# Altium PCB PCB1.PcbDoc
Units mm, origin at the board's own origin, x right, y up, seen from the top; angles counter-clockwise.
Board outline 80 x 65 mm, 4 copper layers (Top Layer 1, Top Layer, Bottom Layer, Bottom Layer 1), stack 0.534 mm thick; 132 components, 100 nets, 450 pads, 41 vias.
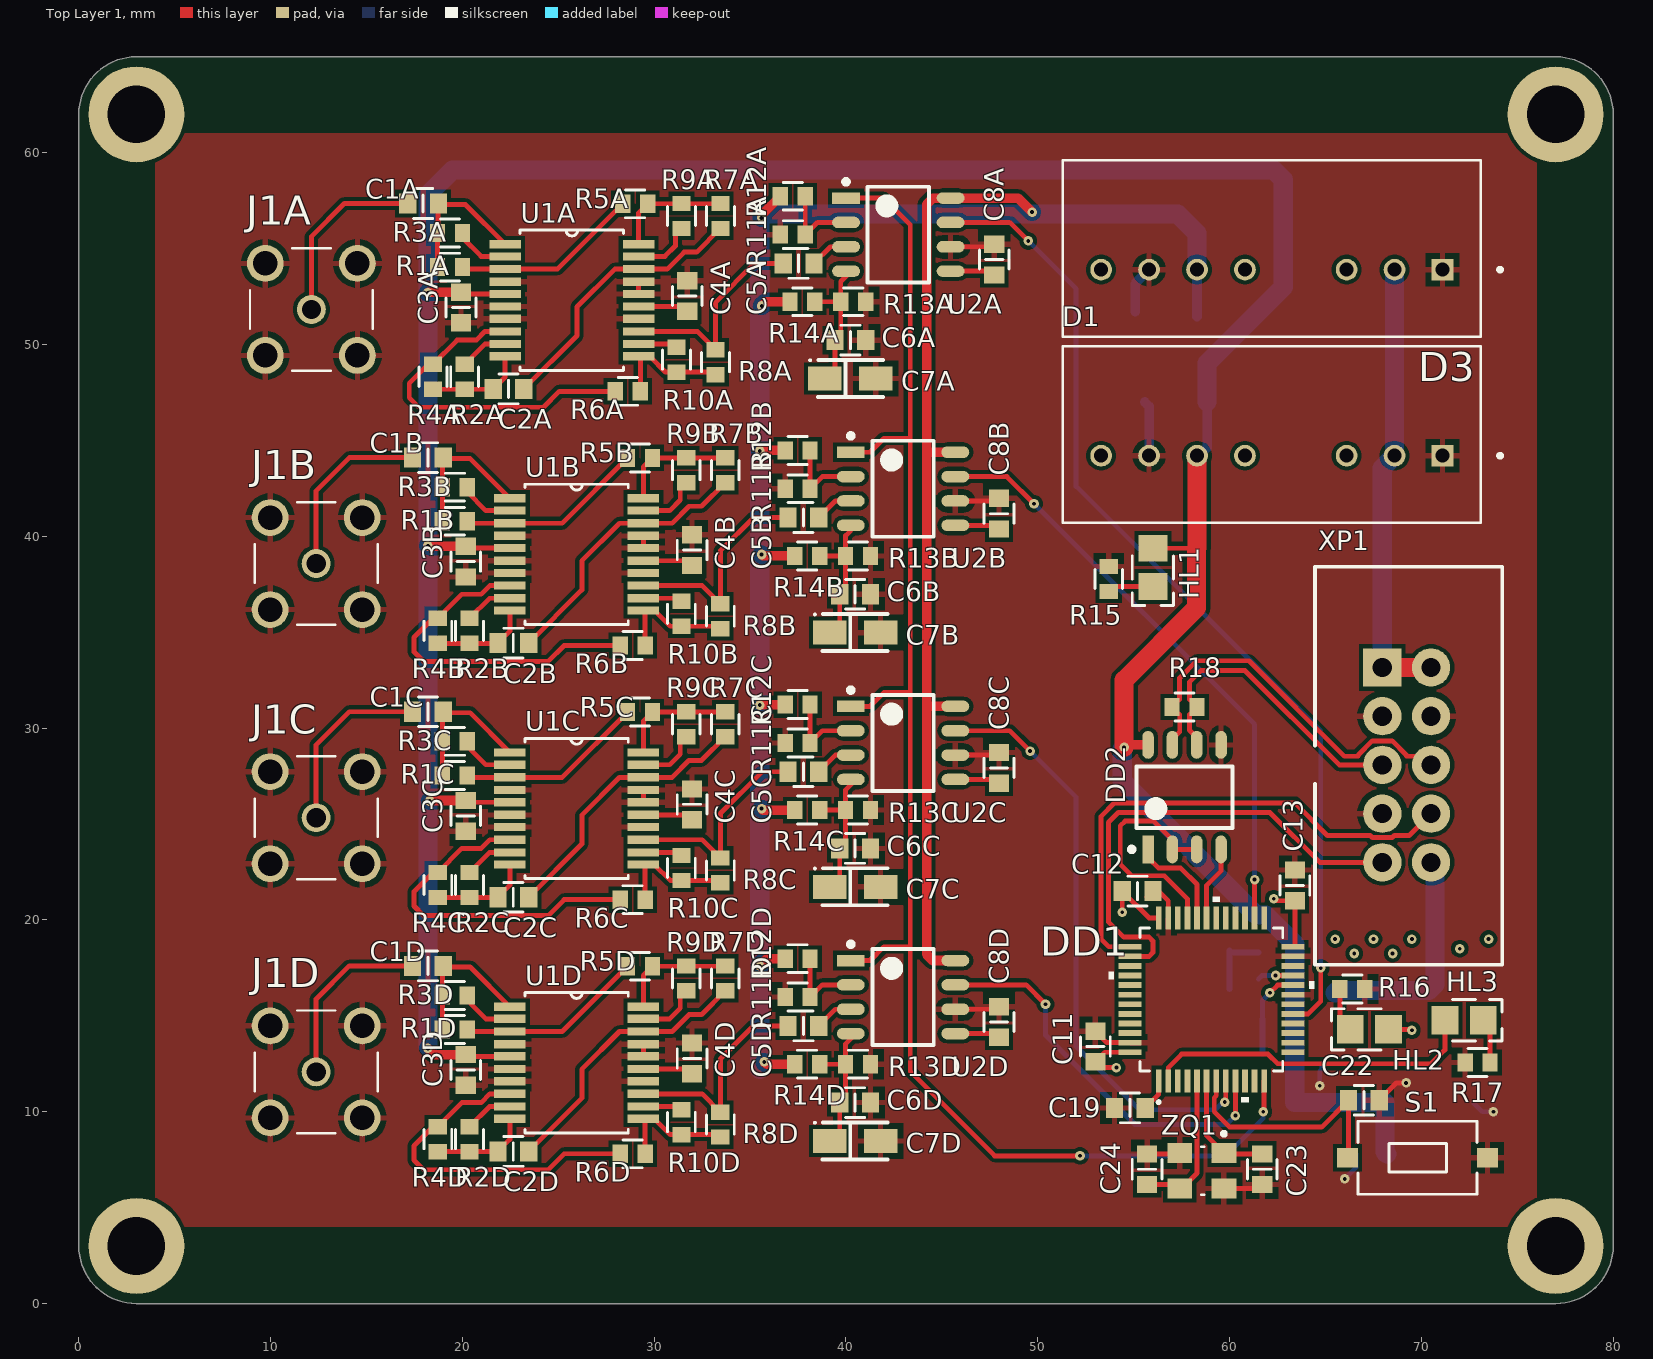
[diagram p0: Top Layer 1 view]
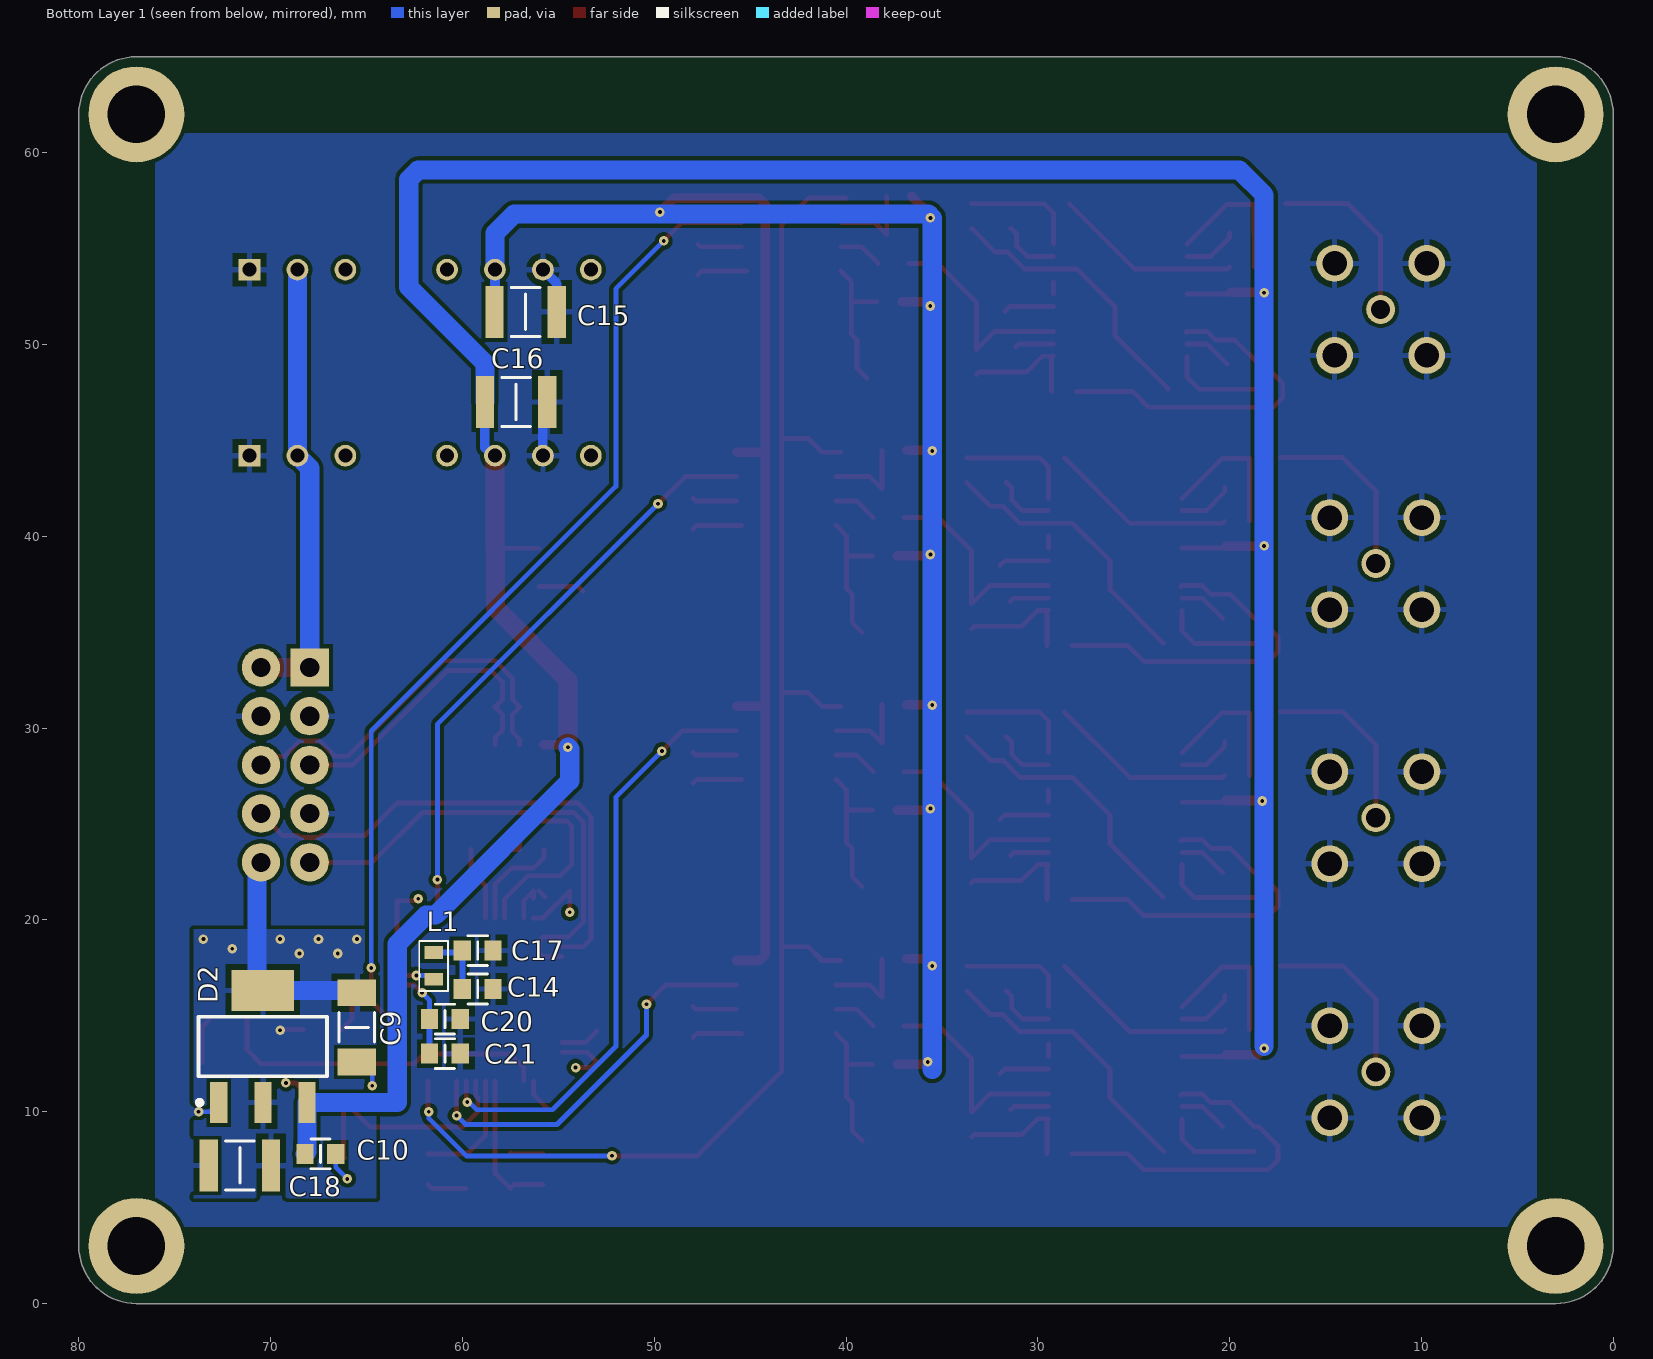
[diagram p1: Bottom Layer 1 view, seen from below]
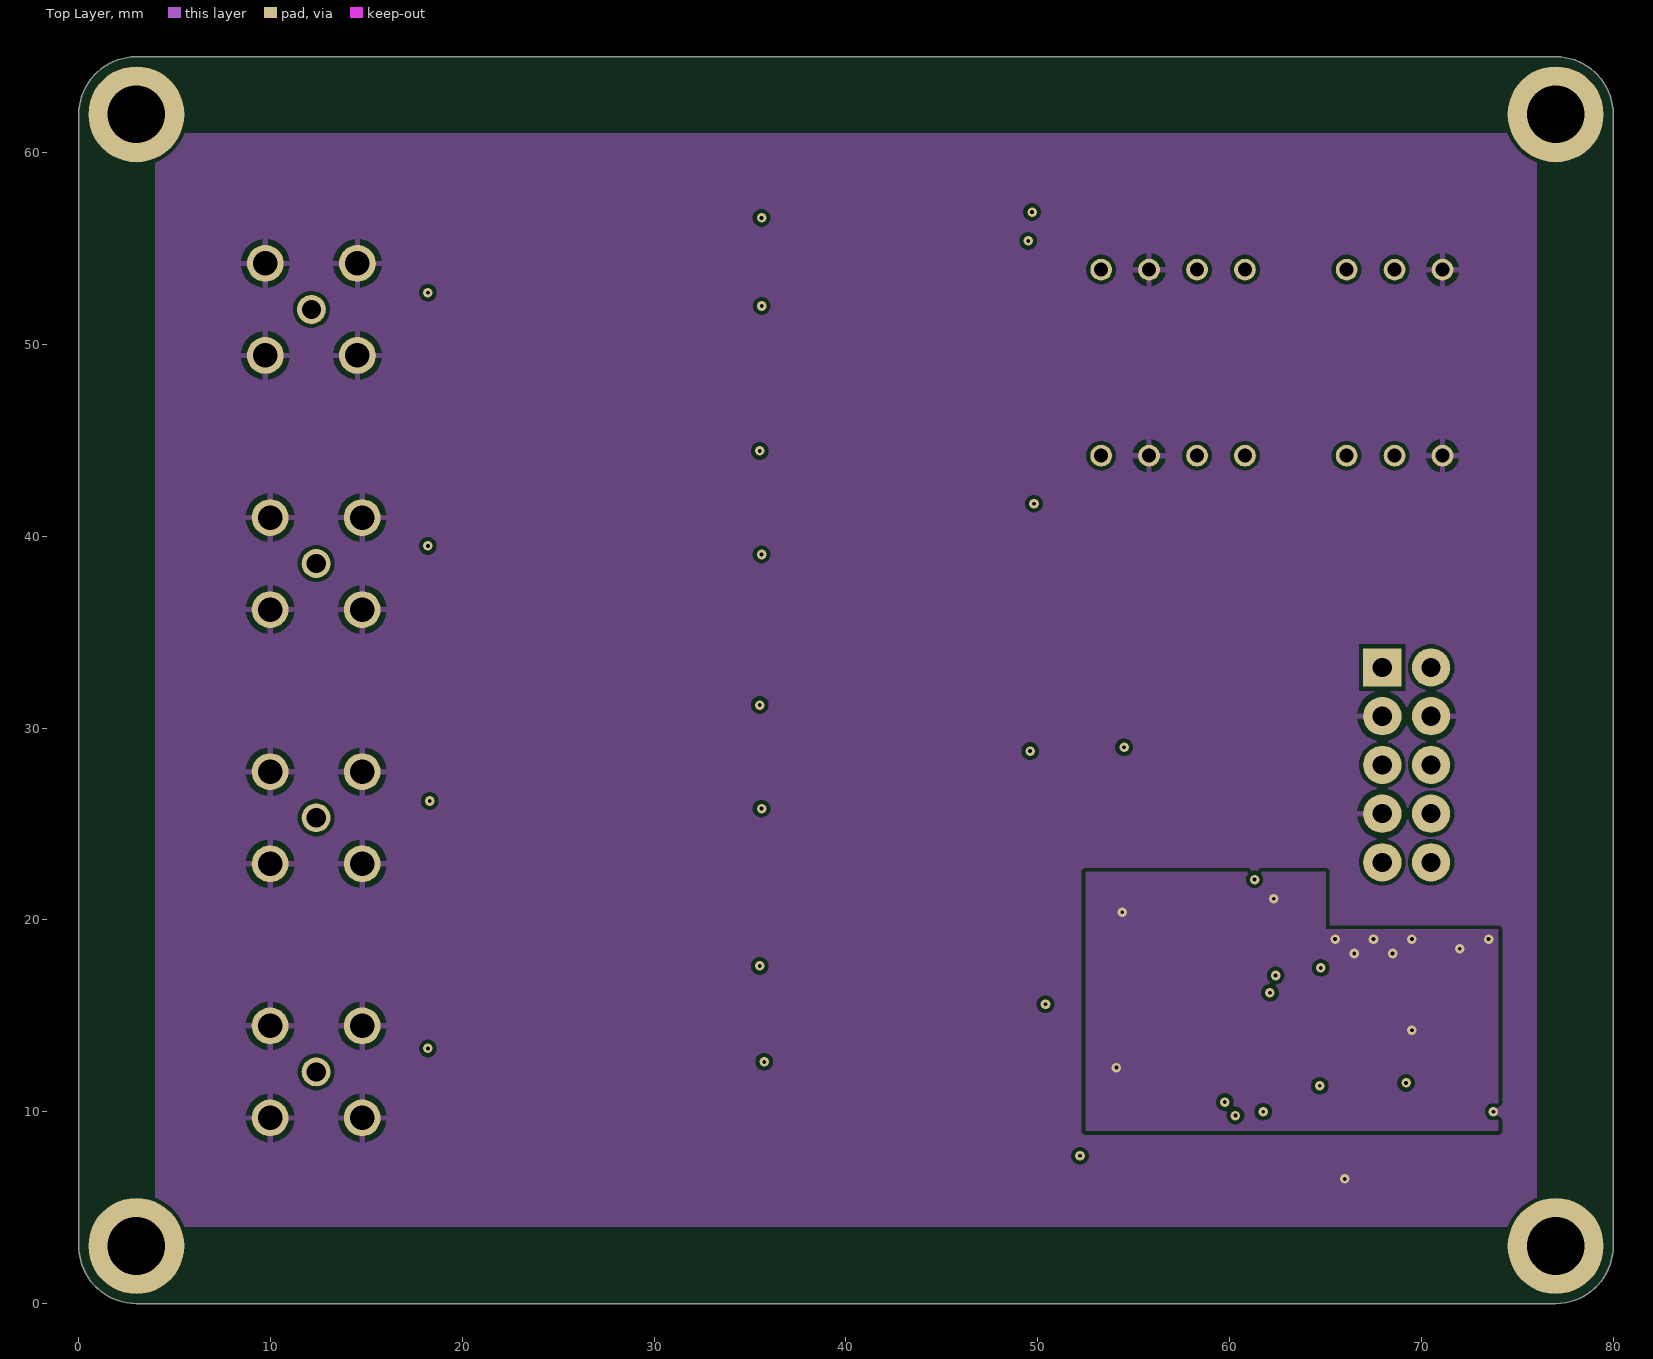
[diagram p2: Top Layer]
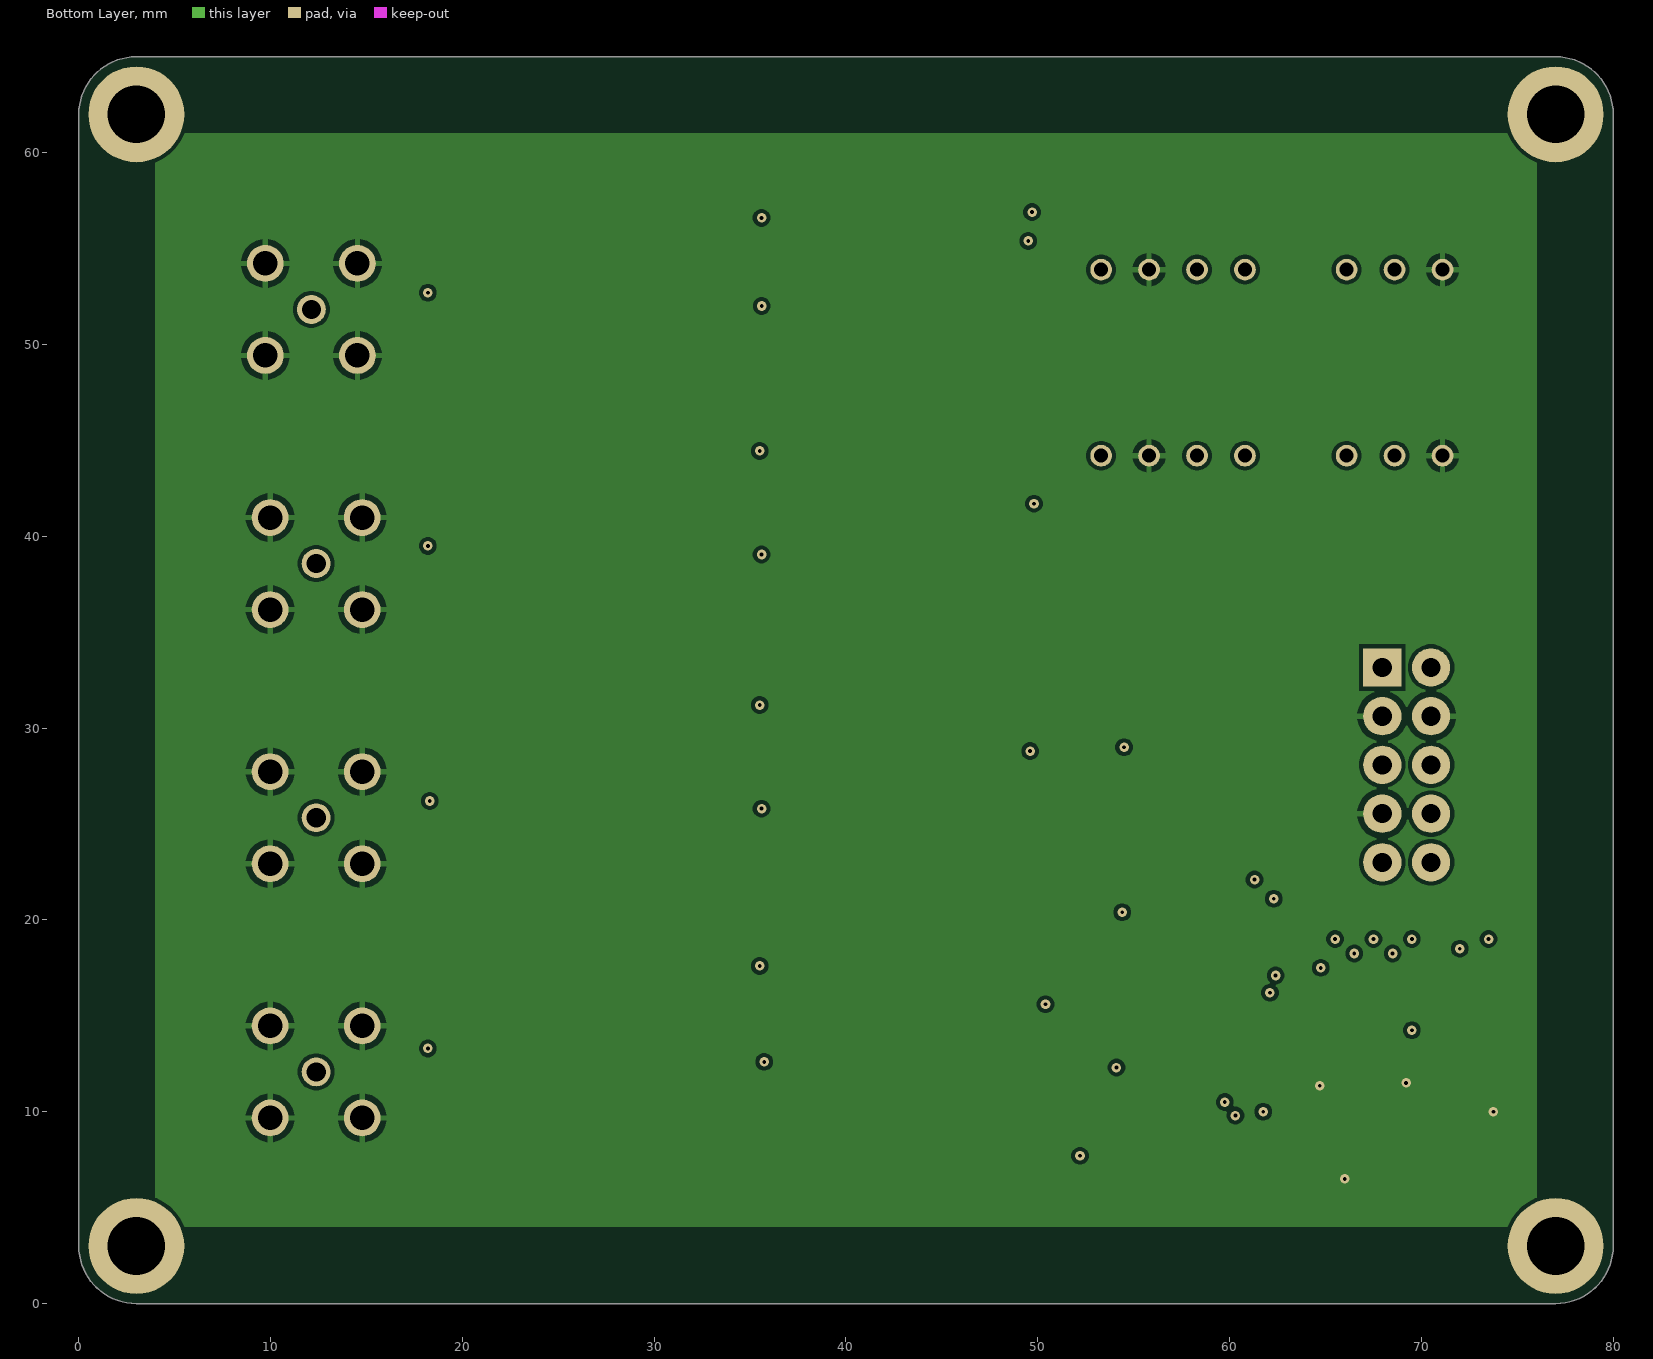
[diagram p3: Bottom Layer]
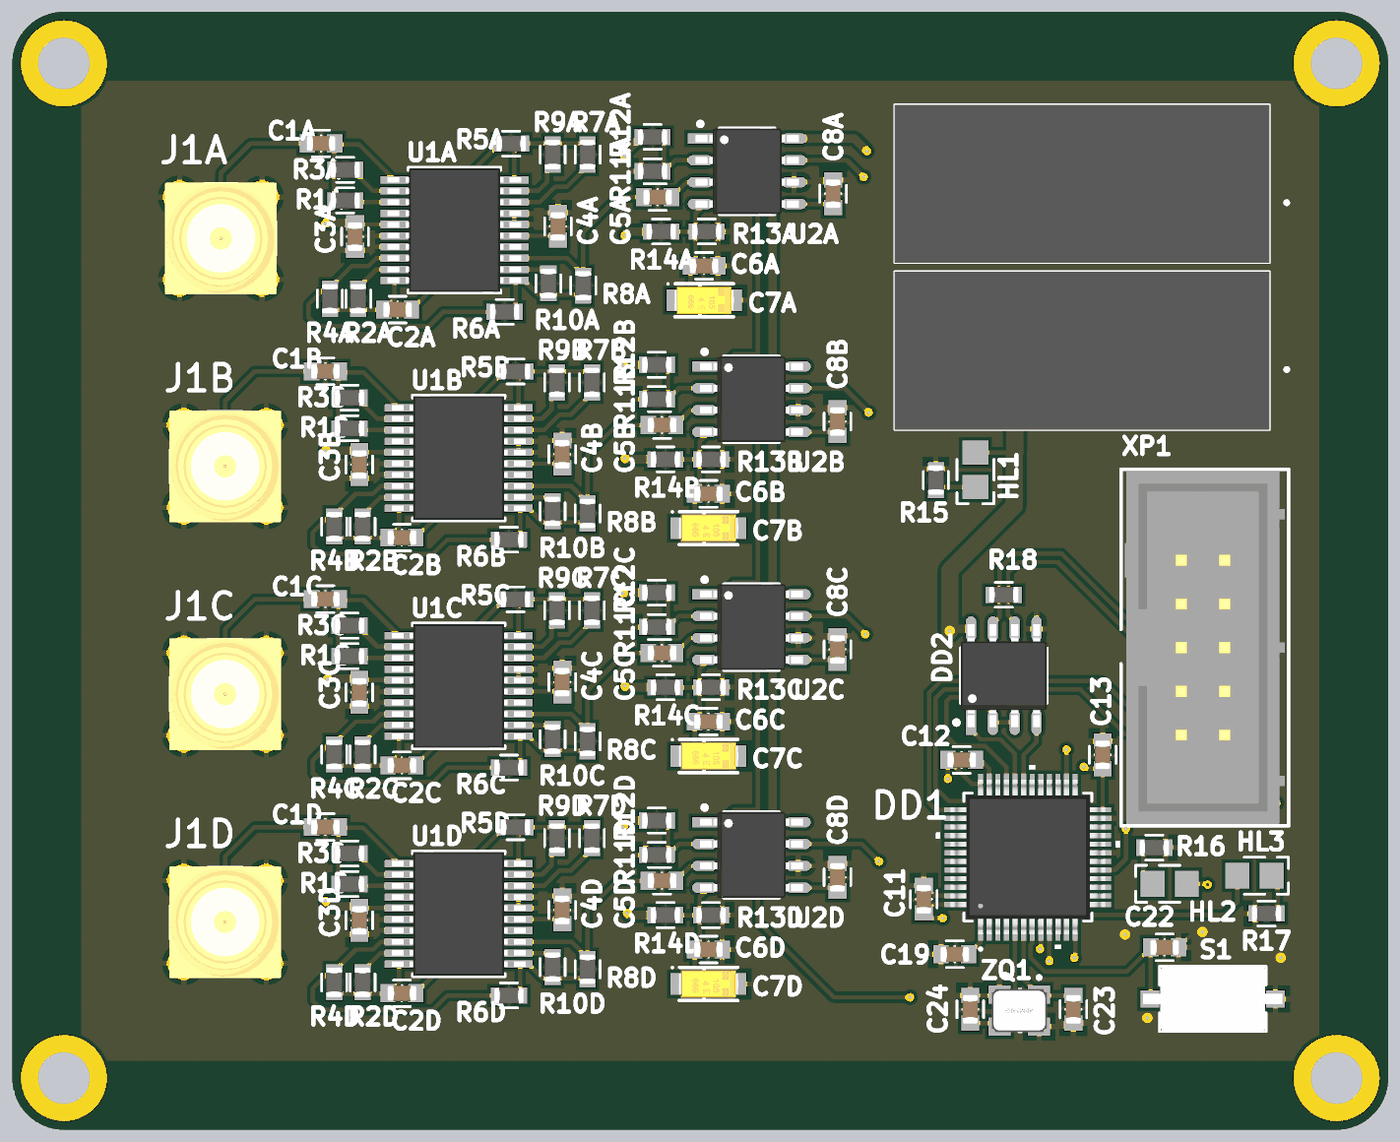
[diagram p4: 3D render of the assembled board from above, using the file's embedded part models]
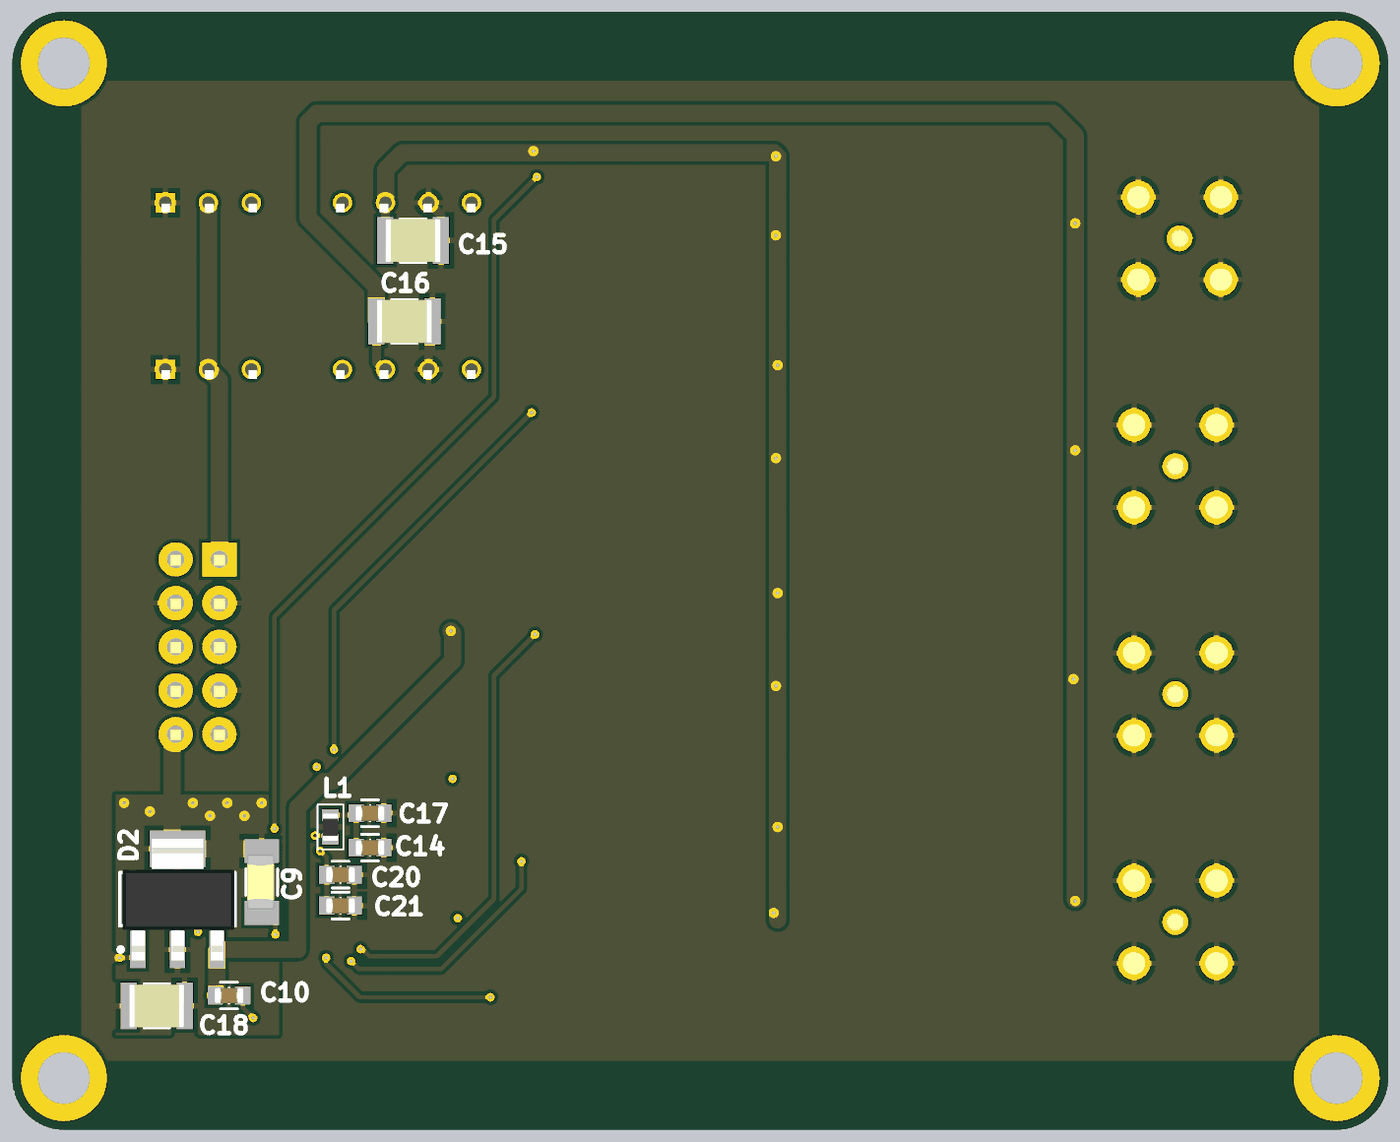
[diagram p5: 3D render of the assembled board from below, using the file's embedded part models]

## Layer stack, top to bottom
Top Solder: solder mask 0.0102, Solder Resist, Dk 3.5
Top Layer 1: signal copper 0.018
Dielectric 2: prepreg 0.0711, PP-006, Dk 4.1
Top Layer: signal copper 0.018
Dielectric 1: dielectric 0.32, FR-4, Dk 4.8
Bottom Layer: signal copper 0.018
Dielectric 3: prepreg 0.0711, PP-006, Dk 4.1
Bottom Layer 1: signal copper 0.018
Bottom Solder: solder mask 0.0102, Solder Resist, Dk 3.5

## Board outline
0,3 0,62 cw(c3,62) 3,65 77,65 cw(c77,62) 80,62 80,3 cw(c77,3) 77,0 3,0 cw(c3,3)

## Design rules (kind name [scope] priority, off if disabled: settings)
AcuteAngle [All] p1: minimum=3.50000000000000E+0001 checktracksonly=FALSE
BoardOutlineClearance "BoardOutlineClearance 1" [All] p1: gap=0.25 ignorepadtopadclearanceinfootprint=FALSE except(0: Arc-SplitContinuation Track-SplitContinuation SMDPad-SplitContinuation THPad-SplitContinuation Via-SplitContinuation Fill-SplitContinuation Poly-SplitContinuation Region-SplitContinuation Text-SplitContinuation) // Milling
BoardOutlineClearance "BoardOutlineClearance 2" [All] p2: gap=0.4 ignorepadtopadclearanceinfootprint=FALSE except(0: Arc-SplitContinuation Track-SplitContinuation SMDPad-SplitContinuation THPad-SplitContinuation Via-SplitContinuation Fill-SplitContinuation Poly-SplitContinuation Region-SplitContinuation Text-SplitContinuation) // V-Cut
Clearance "Clearance-1 1/2 Oz" [All] p1: gap=0.125 ignorepadtopadclearanceinfootprint=FALSE except(0.2: Arc-Fill Arc-Poly Track-Fill Track-Poly SMDPad-SMDPad SMDPad-Fill SMDPad-Poly THPad-Fill THPad-Poly Via-Fill Via-Poly Fill-Fill Fill-Poly Poly-Poly Poly-Region Poly-Text; 0.25: Arc-Hole Track-Hole SMDPad-Hole THPad-Hole Via-Hole Fill-Hole Poly-Hole Region-Hole Text-Hole) // Standart
DiffPairsRouting "DiffPairsRouting 1 Oz" [All] p1: maxlimit=0.254 minlimit=0.2 mostfreqgap=0.254 toplayer_minwidth=0.2 toplayer_maxwidth=0.381 toplayer_prefwidth=0.381 midlayer1_minwidth=0.2 midlayer1_maxwidth=0.381 midlayer1_prefwidth=0.381 midlayer2_minwidth=0.2 midlayer2_maxwidth=0.381 midlayer2_prefwidth=0.381 bottomlayer_minwidth=0.2 bottomlayer_maxwidth=0.381 bottomlayer_prefwidth=0.381 maxuncoupledlength=12.7
DiffPairsRouting "DiffPairsRouting 1/2 Oz" [All] p2: maxlimit=0.254 minlimit=0.1 mostfreqgap=0.254 toplayer_minwidth=0.1 toplayer_maxwidth=0.381 toplayer_prefwidth=0.381 midlayer1_minwidth=0.1 midlayer1_maxwidth=0.381 midlayer1_prefwidth=0.381 midlayer2_minwidth=0.1 midlayer2_maxwidth=0.381 midlayer2_prefwidth=0.381 bottomlayer_minwidth=0.1 bottomlayer_maxwidth=0.381 bottomlayer_prefwidth=0.381 maxuncoupledlength=12.7
HoleSize "Minimum HoleSize VIA 1" [IsVia] p1: absolutevalues=TRUE maxlimit=5.9 minlimit=0.2 maxpercent=80.000 minpercent=20.000 // Standart
HoleToHoleClearance Hole2HoleClearance [All] p1: gap=0.25 allowstackedmicrovias=FALSE
MinimumAnnularRing "Minimum AR VIA Standart" [IsVia] p1: minimumring=0.15
MinimumAnnularRing "Minimum AR PAD Standart" [IsPAD] p2: minimumring=0.2
MinimumAnnularRing "Minimum AR VIA Advance" [IsVia] p3: minimumring=0.1
MinimumAnnularRing "Minimum AR PAD Advance" [IsPAD] p4: minimumring=0.15
MinimumSolderMaskSliver "SolderMask Bridge Standart" [All] p1: minsoldermaskwidth=0.15 // All Masks
MinimumSolderMaskSliver "SolderMask Bridge Advance" [All] p2: minsoldermaskwidth=0.1 // Mask LDI
PlaneClearance "PlaneClearance 3 Oz" [All] p1 off: clearance=0.35
PlaneClearance "PlaneClearance 2 Oz" [All] p2: clearance=0.3
PlaneClearance "PlaneClearance 1 Oz" [All] p3: clearance=0.2
PlaneClearance "PlaneClearance-1 1/2 Oz" [All] p4: clearance=0.2 // Standart
PlaneClearance "PlaneClearance-2 1/2 Oz" [All] p5: clearance=0.15 // Advance
PlaneConnect "TermalConnect 3 Oz" [All] p1 off: planeconnectstyle=Relief reliefexpansion=0.2 reliefentries=4 reliefconductorwidth=0.35 reliefairgap=0.35 // Standart
PlaneConnect "TermalConnect 2 Oz" [All] p2: planeconnectstyle=Relief reliefexpansion=0.2 reliefentries=4 reliefconductorwidth=0.3 reliefairgap=0.3 // Standart
PlaneConnect "TermalConnect-1 1 Oz" [All] p3: planeconnectstyle=Relief reliefexpansion=0.2 reliefentries=4 reliefconductorwidth=0.2 reliefairgap=0.2 // Standart
PlaneConnect "TermalConnect-2 1 Oz" [All] p4: pad.planeconnectstyle=Relief pad.reliefexpansion=0.15 pad.reliefentries=4 pad.reliefconductorwidth=0.2 pad.reliefairgap=0.2 via.planeconnectstyle=Direct via.reliefexpansion=0.15 via.reliefentries=4 via.reliefconductorwidth=0.15 via.reliefairgap=0.15 // Advance
PlaneConnect "TermalConnect-1 1/2 Oz" [All] p5: planeconnectstyle=Relief reliefexpansion=0.2 reliefentries=4 reliefconductorwidth=0.2 reliefairgap=0.2 // Standart
PlaneConnect "TermalConnect-2 1/2 Oz" [All] p6: pad.planeconnectstyle=Relief pad.reliefexpansion=0.15 pad.reliefentries=4 pad.reliefconductorwidth=0.15 pad.reliefairgap=0.15 via.planeconnectstyle=Direct via.reliefexpansion=0.15 via.reliefentries=4 via.reliefconductorwidth=0.15 via.reliefairgap=0.15 // Advance
PolygonConnect "PolygonConnect 3 Oz" [All] p1 off: thpad.connectstyle=Relief thpad.reliefconductorwidth=0.35 thpad.reliefentries=4 thpad.polygonreliefangle="90 Angle" thpad.airgapwidth=0.35 smdpad.connectstyle=Relief smdpad.reliefconductorwidth=0.35 smdpad.reliefentries=4 smdpad.polygonreliefangle="90 Angle" smdpad.airgapwidth=0.35 via.connectstyle=Direct via.reliefconductorwidth=0.254 via.reliefentries=4 via.polygonreliefangle="90 Angle" via.airgapwidth=0.254
PolygonConnect "PolygonConnect 2 Oz" [All] p2: thpad.connectstyle=Relief thpad.reliefconductorwidth=0.3 thpad.reliefentries=4 thpad.polygonreliefangle="90 Angle" thpad.airgapwidth=0.3 smdpad.connectstyle=Relief smdpad.reliefconductorwidth=0.3 smdpad.reliefentries=4 smdpad.polygonreliefangle="90 Angle" smdpad.airgapwidth=0.3 via.connectstyle=Direct via.reliefconductorwidth=0.254 via.reliefentries=4 via.polygonreliefangle="90 Angle" via.airgapwidth=0.254
PolygonConnect "PolygonConnect-1 1 Oz" [All] p3: thpad.connectstyle=Relief thpad.reliefconductorwidth=0.2 thpad.reliefentries=4 thpad.polygonreliefangle="90 Angle" thpad.airgapwidth=0.2 smdpad.connectstyle=Relief smdpad.reliefconductorwidth=0.2 smdpad.reliefentries=4 smdpad.polygonreliefangle="90 Angle" smdpad.airgapwidth=0.2 via.connectstyle=Direct via.reliefconductorwidth=0.254 via.reliefentries=4 via.polygonreliefangle="90 Angle" via.airgapwidth=0.254 // Standart
PolygonConnect "PolygonConnect-2 1 Oz" [All] p4: thpad.connectstyle=Relief thpad.reliefconductorwidth=0.15 thpad.reliefentries=4 thpad.polygonreliefangle="90 Angle" thpad.airgapwidth=0.15 smdpad.connectstyle=Relief smdpad.reliefconductorwidth=0.15 smdpad.reliefentries=4 smdpad.polygonreliefangle="90 Angle" smdpad.airgapwidth=0.15 via.connectstyle=Direct via.reliefconductorwidth=0.254 via.reliefentries=4 via.polygonreliefangle="90 Angle" via.airgapwidth=0.254 // Advance
PolygonConnect "PolygonConnect-1 1/2 Oz" [All] p5: thpad.connectstyle=Relief thpad.reliefconductorwidth=0.15 thpad.reliefentries=4 thpad.polygonreliefangle="90 Angle" thpad.airgapwidth=0.2 smdpad.connectstyle=Relief smdpad.reliefconductorwidth=0.2 smdpad.reliefentries=4 smdpad.polygonreliefangle="90 Angle" smdpad.airgapwidth=0.2 via.connectstyle=Direct via.reliefconductorwidth=0.254 via.reliefentries=4 via.polygonreliefangle="90 Angle" via.airgapwidth=0.254 // Standart
PolygonConnect "PolygonConnect-2 1/2 Oz" [All] p6: thpad.connectstyle=Relief thpad.reliefconductorwidth=0.125 thpad.reliefentries=4 thpad.polygonreliefangle="90 Angle" thpad.airgapwidth=0.15 smdpad.connectstyle=Relief smdpad.reliefconductorwidth=0.125 smdpad.reliefentries=4 smdpad.polygonreliefangle="90 Angle" smdpad.airgapwidth=0.15 via.connectstyle=Direct via.reliefconductorwidth=0.254 via.reliefentries=4 via.polygonreliefangle="90 Angle" via.airgapwidth=0.254 // Advance
RoomDefinition CH4 [InComponentClass('CH4')] p1: confinementstyle=ConfineIn formatcopy=TRUE lockcomponents=FALSE outline 8.454,6.6 49.204,6.6 49.204,19.35 8.454,19.35
RoomDefinition CH1 [InComponentClass('CH1')] p2: confinementstyle=ConfineIn formatcopy=TRUE lockcomponents=FALSE outline 8.204,46.35 48.954,46.35 48.954,59.1 8.204,59.1
RoomDefinition CH3 [InComponentClass('CH3')] p3: confinementstyle=ConfineIn formatcopy=TRUE lockcomponents=FALSE outline 8.454,19.85 49.204,19.85 49.204,32.6 8.454,32.6
RoomDefinition CH2 [InComponentClass('CH2')] p4: confinementstyle=ConfineIn formatcopy=TRUE lockcomponents=FALSE outline 8.454,33.1 49.204,33.1 49.204,45.85 8.454,45.85
RoutingCorners [All] p1 off: cornerstyle=45-Degree minsetback=2.54 maxsetback=2.54
RoutingVias [All] p1: holewidth=0.3 width=0.6 viastyle="Through Hole" minholewidth=0.2 minwidth=0.4 maxholewidth=5.9 maxwidth=6.4
SilkToSilkClearance Silk2SilkClearance [All] p1 off: silktosilkclearance=0.15
SilkToSolderMaskClearance Silk2SolderMaskClearance [IsPad] p1 off: minsilkscreentomaskgap=0.15 clearancetoexposedcopper=TRUE
SolderMaskExpansion SolderMaskExpansion-1 [All] p1: expansion=0.05 istentingtop=FALSE // Standart
SupplyNets "Schematic Supply Nets_6" [InNet('+3,3В')] p1: voltage=0.000
SupplyNets "Schematic Supply Nets_4" [InNet('+16В')] p2: voltage=0.000
SupplyNets "Schematic Supply Nets_3" [InNet('AGND')] p3: voltage=0.000
SupplyNets "Schematic Supply Nets_1" [InNet('+12В')] p4: voltage=0.000
SupplyNets "Schematic Supply Nets" [InNet('+5В')] p5: voltage=0.000
UnRoutedNet [All] p1: checkbadconnections=TRUE
Width "Width 1/2 Oz" [All] p1: maxlimit=10 minlimit=0.1 preferedwidth=0.125 checkconnectedcopper=TRUE
20 further rules are at their usual default settings.

## Classes and differential pairs
component class Main: C9 C10 C11 C12 C13 C14 C15 C16 C17 C18 C19 C20 C21 C22 C23 C24 D1 D2 D3 DD1 DD2 HL1 HL2 HL3 L1 R15 R16 R17 R18 S1 XP1 ZQ1
channel class Chanel: CH1 CH2 CH3 CH4
component class CH4: C1D C2D C3D C4D C5D C6D C7D C8D J1D R1D R2D R3D R4D R5D R6D R7D R8D R9D R10D R11D R12D R13D R14D U1D U2D
component class CH3: C1C C2C C3C C4C C5C C6C C7C C8C J1C R1C R2C R3C R4C R5C R6C R7C R8C R9C R10C R11C R12C R13C R14C U1C U2C
component class CH2: C1B C2B C3B C4B C5B C6B C7B C8B J1B R1B R2B R3B R4B R5B R6B R7B R8B R9B R10B R11B R12B R13B R14B U1B U2B
component class CH1: C1A C2A C3A C4A C5A C6A C7A C8A J1A R1A R2A R3A R4A R5A R6A R7A R8A R9A R10A R11A R12A R13A R14A U1A U2A
differential pair RS485: +RS485_P -RS485_N

## Components (designator, comment, footprint, x,y, rotation, side; value= is the part's Value field where it differs from the comment)
C1A "Capacitor" 0603C 17.954,57.35 r0 top value=15.8п (schematic designator C1)
C1B "Capacitor" 0603C 18.204,44.1 r0 top value=15.8п (schematic designator C1)
C1C "Capacitor" 0603C 18.204,30.85 r0 top value=15.8п (schematic designator C1)
C1D "Capacitor" 0603C 18.204,17.6 r0 top value=15.8п (schematic designator C1)
C2A "Capacitor" 0603C 22.405,47.683 r180 top value=15.8п (schematic designator C2)
C2B "Capacitor" 0603C 22.655,34.433 r180 top value=15.8п (schematic designator C2)
C2C "Capacitor" 0603C 22.655,21.183 r180 top value=15.8п (schematic designator C2)
C2D "Capacitor" 0603C 22.655,7.933 r180 top value=15.8п (schematic designator C2)
C3A "Capacitor" 0603C 19.927,51.927 r90 top value="0,1 мк" (schematic designator C3)
C3B "Capacitor" 0603C 20.177,38.677 r90 top value="0,1 мк" (schematic designator C3)
C3C "Capacitor" 0603C 20.177,25.427 r90 top value="0,1 мк" (schematic designator C3)
C3D "Capacitor" 0603C 20.177,12.177 r90 top value="0,1 мк" (schematic designator C3)
C4A "Capacitor" 0603C 31.727,52.527 r270 top value="1 мк" (schematic designator C4)
C4B "Capacitor" 0603C 31.977,39.277 r270 top value="1 мк" (schematic designator C4)
C4C "Capacitor" 0603C 31.977,26.027 r270 top value="1 мк" (schematic designator C4)
C4D "Capacitor" 0603C 31.977,12.777 r270 top value="1 мк" (schematic designator C4)
C5A "Capacitor" 0603C 37.527,54.227 r0 top value="0,1 мк" (schematic designator C5)
C5B "Capacitor" 0603C 37.777,40.977 r0 top value="0,1 мк" (schematic designator C5)
C5C "Capacitor" 0603C 37.777,27.727 r0 top value="0,1 мк" (schematic designator C5)
C5D "Capacitor" 0603C 37.777,14.477 r0 top value="0,1 мк" (schematic designator C5)
C6A "Capacitor" 0603C 40.227,50.227 r0 top value="0,1 мк" (schematic designator C6)
C6B "Capacitor" 0603C 40.477,36.977 r0 top value="0,1 мк" (schematic designator C6)
C6C "Capacitor" 0603C 40.477,23.727 r0 top value="0,1 мк" (schematic designator C6)
C6D "Capacitor" 0603C 40.477,10.477 r0 top value="0,1 мк" (schematic designator C6)
C7A "Capacitor" TC_A 40.227,48.227 r0 top value="100 мк" (schematic designator C7)
C7B "Capacitor" TC_A 40.477,34.977 r0 top value="100 мк" (schematic designator C7)
C7C "Capacitor" TC_A 40.477,21.727 r0 top value="100 мк" (schematic designator C7)
C7D "Capacitor" TC_A 40.477,8.477 r0 top value="100 мк" (schematic designator C7)
C8A "Capacitor" 0603C 47.727,54.427 r270 top value=15.8п (schematic designator C8)
C8B "Capacitor" 0603C 47.977,41.177 r270 top value=15.8п (schematic designator C8)
C8C "Capacitor" 0603C 47.977,27.927 r270 top value=15.8п (schematic designator C8)
C8D "Capacitor" 0603C 47.977,14.677 r270 top value=15.8п (schematic designator C8)
C9 "Capacitor" 1206C 65.5,14.4 r90 bottom value="4,7 мк"
C10 "Capacitor" 0603C 67.4,7.8 r0 bottom value="0,1 мк"
C11 "Capacitor" 0603C 53,13.4 r270 top value="0,1 мк"
C12 "Capacitor" 0603C 55.2,21.5 r180 top value="0,1 мк"
C13 "Capacitor" 0603C 63.4,21.8 r270 top value="0,1 мк"
C14 "Capacitor" 0603C 59.2,16.4 r0 bottom value="1 мк"
C15 "Capacitor" 1210C 56.7,51.7 r0 bottom value="10 мк"
C16 "Capacitor" 1210C 57.2,47 r0 bottom value="10 мк"
C17 "Capacitor" 0603C 59.2,18.4 r0 bottom value="0,1 мк"
C18 "Capacitor" 1210C 71.6,7.2 r180 bottom value="10 мк"
C19 "Capacitor" 0603C 54.8,10.2 r0 top value="1 мк"
C20 "Capacitor" 0603C 60.914,14.828 r0 bottom value="1 мк"
C21 "Capacitor" 0603C 60.914,13.028 r0 bottom value="0,1 мк"
C22 "Capacitor" 0603C 67,10.6 r180 top value="0,1 мк"
C23 "Capacitor" 0603C 61.7,7 r90 top value="12 п"
C24 "Capacitor" 0603C 55.7,7 r270 top value="12 п"
D1 "SPBW06F-5" CONV_SPBW06F-12 62.2,45.3 r180 top
D2 "LD1117S33CTR" SOT223 70.4,13.4 r90 bottom
D3 "SPBW06F-12" CONV_SPBW06F-12 62.2,55 r180 top
DD1 "STM32G473CBTx" LQFP48-7x7mm 59.05,15.85 r90 top locked value=Value
DD2 "MAX485CSA" SOIC-8 57.65,26.4 r90 top
HL1 "LED" 0805D 56,38.373 r270 top
HL2 "LED" 0805D 67.292,14.295 r180 top
HL3 "LED" 0805D 72.226,14.768 r0 top
J1A "SMA_CONNECTOR" SMA_CONNECTOR 12.127,51.827 r90 top (schematic designator J1)
J1B "SMA_CONNECTOR" SMA_CONNECTOR 12.377,38.577 r90 top (schematic designator J1)
J1C "SMA_CONNECTOR" SMA_CONNECTOR 12.377,25.327 r90 top (schematic designator J1)
J1D "SMA_CONNECTOR" SMA_CONNECTOR 12.377,12.077 r90 top (schematic designator J1)
L1 "FCM1608KF-601T05" 0603L 61.5,17.6 r270 bottom
R1A "Resistor" 0603R 19.357,54.033 r0 top value="100 к" (schematic designator R1)
R1B "Resistor" 0603R 19.607,40.783 r0 top value="100 к" (schematic designator R1)
R1C "Resistor" 0603R 19.607,27.533 r0 top value="100 к" (schematic designator R1)
R1D "Resistor" 0603R 19.607,14.283 r0 top value="100 к" (schematic designator R1)
R2A "Resistor" 0603R 20.119,48.318 r90 top value="100 к" (schematic designator R2)
R2B "Resistor" 0603R 20.369,35.068 r90 top value="100 к" (schematic designator R2)
R2C "Resistor" 0603R 20.369,21.818 r90 top value="100 к" (schematic designator R2)
R2D "Resistor" 0603R 20.369,8.568 r90 top value="100 к" (schematic designator R2)
R3A "Resistor" 0603R 19.357,55.811 r0 top value="52.3 к" (schematic designator R3)
R3B "Resistor" 0603R 19.607,42.561 r0 top value="52.3 к" (schematic designator R3)
R3C "Resistor" 0603R 19.607,29.311 r0 top value="52.3 к" (schematic designator R3)
R3D "Resistor" 0603R 19.607,16.061 r0 top value="52.3 к" (schematic designator R3)
R4A "Resistor" 0603R 18.468,48.318 r90 top value="52.3 к" (schematic designator R4)
R4B "Resistor" 0603R 18.718,35.068 r90 top value="52.3 к" (schematic designator R4)
R4C "Resistor" 0603R 18.718,21.818 r90 top value="52.3 к" (schematic designator R4)
R4D "Resistor" 0603R 18.718,8.568 r90 top value="52.3 к" (schematic designator R4)
R5A "Resistor" 0603R 29.009,57.335 r0 top value="270 к" (schematic designator R5)
R5B "Resistor" 0603R 29.259,44.085 r0 top value="270 к" (schematic designator R5)
R5C "Resistor" 0603R 29.259,30.835 r0 top value="270 к" (schematic designator R5)
R5D "Resistor" 0603R 29.259,17.585 r0 top value="270 к" (schematic designator R5)
R6A "Resistor" 0603R 28.628,47.556 r0 top value="270 к" (schematic designator R6)
R6B "Resistor" 0603R 28.878,34.306 r0 top value="270 к" (schematic designator R6)
R6C "Resistor" 0603R 28.878,21.056 r0 top value="270 к" (schematic designator R6)
R6D "Resistor" 0603R 28.878,7.806 r0 top value="270 к" (schematic designator R6)
R7A "Resistor" 0603R 33.454,56.7 r90 top value="47.5 к" (schematic designator R7)
R7B "Resistor" 0603R 33.704,43.45 r90 top value="47.5 к" (schematic designator R7)
R7C "Resistor" 0603R 33.704,30.2 r90 top value="47.5 к" (schematic designator R7)
R7D "Resistor" 0603R 33.704,16.95 r90 top value="47.5 к" (schematic designator R7)
R8A "Resistor" 0603R 33.2,49.08 r270 top value="47.5 к" (schematic designator R8)
R8B "Resistor" 0603R 33.45,35.83 r270 top value="47.5 к" (schematic designator R8)
R8C "Resistor" 0603R 33.45,22.58 r270 top value="47.5 к" (schematic designator R8)
R8D "Resistor" 0603R 33.45,9.33 r270 top value="47.5 к" (schematic designator R8)
R9A "Resistor" 0603R 31.422,56.7 r90 top value="93.1 к" (schematic designator R9)
R9B "Resistor" 0603R 31.672,43.45 r90 top value="93.1 к" (schematic designator R9)
R9C "Resistor" 0603R 31.672,30.2 r90 top value="93.1 к" (schematic designator R9)
R9D "Resistor" 0603R 31.672,16.95 r90 top value="93.1 к" (schematic designator R9)
R10A "Resistor" 0603R 31.168,49.207 r270 top value="93.1 к" (schematic designator R10)
R10B "Resistor" 0603R 31.418,35.957 r270 top value="93.1 к" (schematic designator R10)
R10C "Resistor" 0603R 31.418,22.707 r270 top value="93.1 к" (schematic designator R10)
R10D "Resistor" 0603R 31.418,9.457 r270 top value="93.1 к" (schematic designator R10)
R11A "Resistor" 0603R 37.227,55.727 r0 top value="1,1 к" (schematic designator R11)
R11B "Resistor" 0603R 37.477,42.477 r0 top value="1,1 к" (schematic designator R11)
R11C "Resistor" 0603R 37.477,29.227 r0 top value="1,1 к" (schematic designator R11)
R11D "Resistor" 0603R 37.477,15.977 r0 top value="1,1 к" (schematic designator R11)
R12A "Resistor" 0603R 37.227,57.727 r180 top value="12 к" (schematic designator R12)
R12B "Resistor" 0603R 37.477,44.477 r180 top value="12 к" (schematic designator R12)
R12C "Resistor" 0603R 37.477,31.227 r180 top value="12 к" (schematic designator R12)
R12D "Resistor" 0603R 37.477,17.977 r180 top value="12 к" (schematic designator R12)
R13A "Resistor" 0603R 40.377,52.227 r180 top value="3,0 к" (schematic designator R13)
R13B "Resistor" 0603R 40.627,38.977 r180 top value="3,0 к" (schematic designator R13)
R13C "Resistor" 0603R 40.627,25.727 r180 top value="3,0 к" (schematic designator R13)
R13D "Resistor" 0603R 40.627,12.477 r180 top value="3,0 к" (schematic designator R13)
R14A "Resistor" 0603R 37.727,52.227 r180 top value="3,0 к" (schematic designator R14)
R14B "Resistor" 0603R 37.977,38.977 r180 top value="3,0 к" (schematic designator R14)
R14C "Resistor" 0603R 37.977,25.727 r180 top value="3,0 к" (schematic designator R14)
R14D "Resistor" 0603R 37.977,12.477 r180 top value="3,0 к" (schematic designator R14)
R15 "Resistor" 0603R 53.7,37.773 r270 top value="2,0 к"
R16 "Resistor" 0603R 66.4,16.4 r180 top value="1,0 к"
R17 "Resistor" 0603R 72.926,12.568 r0 top value="1,0 к"
R18 "Resistor" 0603R 57.65,31.1 r180 top value=120
S1 "TSS-TD-19XA-XTR" TSS-TD-19XA-XTR 69.8,7.6 r180 top
U1A "LTC1562CG" 20-SSOP 25.707,52.306 r0 top (schematic designator U1)
U1B "LTC1562CG" 20-SSOP 25.957,39.056 r0 top (schematic designator U1)
U1C "LTC1562CG" 20-SSOP 25.957,25.806 r0 top (schematic designator U1)
U1D "LTC1562CG" 20-SSOP 25.957,12.556 r0 top (schematic designator U1)
U2A "AD603ARZ-REEL-REEL7" SOIC-8 42.727,55.727 r0 top (schematic designator U2)
U2B "AD603ARZ-REEL-REEL7" SOIC-8 42.977,42.477 r0 top (schematic designator U2)
U2C "AD603ARZ-REEL-REEL7" SOIC-8 42.977,29.227 r0 top (schematic designator U2)
U2D "AD603ARZ-REEL-REEL7" SOIC-8 42.977,15.977 r0 top (schematic designator U2)
XP1 "IDC-10" IDC-10 69.21,28.085 r0 top
ZQ1 "XTAL_GND" QSMD3.2x2.5 59.7,7.85 r270 top value="8 МГц"

## Footprints (in the part's own frame and the unit in brackets; to place one, negate y for a bottom-side part, rotate by r counter-clockwise, add the part's x,y. Pads: shape width x height; smd on the part's side, far side on the other; paste and mask are expansions set on the pad)
20-SSOP [mil]
  rect 65x17 smd: 1(-137,115) 2(-137,90) 3(-137,64) 4(-137,38) 5(-137,13) 6(-137,-13) 7(-137,-38) 8(-137,-64) 9(-137,-90) 10(-137,-115) 11(137,-115) 12(137,-90) 13(137,-64) 14(137,-38) 15(137,-13) 16(137,13) 17(137,38) 18(137,64) 19(137,90) 20(137,115)
  silkscreen extent -106,-144 106,144, body extent -153,-142 153,142, height 78
0603C [mm] "Chip Resistor, 2-Leads, Body 1,40x0,80mm, IPC Medium Density"
  rect 0.9x1.05 smd: 1(-0.8,0) 2(0.8,0)
  silkscreen extent -0.5,-0.78 0.5,0.77, body extent -0.85,-0.45 0.85,0.45, height 0.9
0603L [mm] "Chip Inductor, 2-Leads, Body 1,55x0,85mm, IPC Medium Density"
  rect 0.67x0.97 smd: 1(-0.695,0) 2(0.695,0)
  silkscreen extent -1.3,-0.75 1.3,0.75, body extent -0.8,-0.45 0.8,0.45, height 0.45
0603R [mm] "Chip Resistor, 2-Leads, Body 1.60x0.85mm, IPC Medium Density"
  rect 0.8x0.95 smd: 1(-0.65,0) 2(0.65,0)
  silkscreen extent -0.5,-0.72 0.5,0.72, body extent -0.87,-0.47 0.88,0.48, height 0.9
0805D [mm]
  rect 1.4x1.5 smd: 1(-1,0) 2(1,0)
  silkscreen extent -0.6,-1.07 1.97,1.07, body extent -1.07,-0.7 1.07,0.7, height 0.7
1206C [mm]
  rect 1.4x2 smd paste+0 mask+0.03: 1(-1.8,0)
  rect 1.4x2 smd paste+0: 2(1.8,0)
  silkscreen extent -0.77,-0.92 0.77,0.92, body extent -1.6,-0.74 1.6,0.86, height 1.59
1210C [mm]
  rect 0.954x2.706 smd paste+0: 1(-1.625,0) 2(1.625,0)
  silkscreen extent -0.75,-1.28 0.75,1.28, body extent -1.6,-1.25 1.6,1.25, height 2.7
CONV_SPBW06F-12 [mm]
  rect 1.13x1.13 / inner round 1.13 / far side rect 1.13x1.13 hole 0.73: 1(-8.9,1.1)
  round 1.13 hole 0.73: 2(-6.4,1.1) 3(-3.9,1.1) 5(1.4,1.1) 6(3.9,1.1) 7(6.4,1.1) 8(8.9,1.1)
  silkscreen extent -12,-4.6 10.9,4.6, body extent -10.9,-4.6 10.9,4.6, height 11.1
IDC-10 [mm] "IDC-10 Male Connector"
  rect 2x2 hole 1: 1(-1.25,5.075)
  round 2 hole 1: 2(1.29,5.075) 3(-1.25,2.535) 4(1.29,2.535) 5(-1.25,-0.005) 6(1.29,-0.005) 7(-1.25,-2.545) 8(1.29,-2.545) 9(-1.25,-5.085) 10(1.29,-5.085)
  silkscreen extent -4.75,-10.42 5,10.32, body extent -4.53,-10.31 4.77,10.19, height 9.1
LQFP48-7x7mm [mm]
  rect 1.194x0.3 smd paste+0 mask+0.025: 1(-4.25,2.75) 2(-4.25,2.25) 3(-4.25,1.75) 4(-4.25,1.25) 5(-4.25,0.75) 6(-4.25,0.25) 7(-4.25,-0.25) 8(-4.25,-0.75) 9(-4.25,-1.25) 10(-4.25,-1.75) 11(-4.25,-2.25) 12(-4.25,-2.75) 25(4.25,-2.75) 26(4.25,-2.25) 27(4.25,-1.75) 28(4.25,-1.25) 29(4.25,-0.75) 30(4.25,-0.25) 31(4.25,0.25) 32(4.25,0.75) 33(4.25,1.25) 34(4.25,1.75) 35(4.25,2.25) 36(4.25,2.75)
  rect 0.3x1.194 smd paste+0 mask+0.025: 13(-2.75,-4.25) 14(-2.25,-4.25) 15(-1.75,-4.25) 16(-1.25,-4.25) 17(-0.75,-4.25) 18(-0.25,-4.25) 19(0.25,-4.25) 20(0.75,-4.25) 21(1.25,-4.25) 22(1.75,-4.25) 23(2.25,-4.25) 24(2.75,-4.25) 37(2.75,4.25) 38(2.25,4.25) 39(1.75,4.25) 40(1.25,4.25) 41(0.75,4.25) 42(0.25,4.25) 43(-0.25,4.25) 44(-0.75,4.25) 45(-1.25,4.25) 46(-1.75,4.25) 47(-2.25,4.25) 48(-2.75,4.25)
  silkscreen extent -5.43,-5.35 5.35,5.35, body extent -4.5,-4.5 4.5,4.5, height 1.6
QSMD3.2x2.5 [mm] "Кварцевый резонатор"
  rect 1.05x1.3 smd: 1(0,0) 2(1.85,-2.3) 3(0,-2.3) 3(1.85,0)
  silkscreen extent -1.1,-1.18 2.18,0.1, body extent -0.32,-2.75 2.18,0.45, height 0.8
SMA_CONNECTOR [mm]
  round 1.508 hole 1: 1(0,0)
  round 1.92 hole 1.28: G1(-2.4,2.4) G2(-2.4,-2.4) G3(2.4,-2.4) G4(2.4,2.4)
  silkscreen extent -3.2,-3.2 3.2,3.2, body extent -3.25,-3.25 3.25,3.25, height 13.6
SOIC-8 [mm] "for operational amplifier"
  rect 1.45x0.6 smd: 1(-2.725,1.905)
  oval 1.45x0.6 smd: 2(-2.725,0.635) 3(-2.725,-0.635) 4(-2.725,-1.905) 5(2.725,-1.905) 6(2.725,-0.635) 7(2.725,0.635) 8(2.725,1.905)
  silkscreen extent -2.85,-2.5 1.6,2.88, body extent -3,-2.5 3,2.5, height 1.75
SOT223 [mm] "SOT223, ld1117"
  rect 2.15x0.9 smd: 1(-2.925,2.3) 2(-2.925,0) 3(-2.925,-2.3)
  rect 2.15x3.25 smd: 2(2.925,0)
  silkscreen extent -3.05,-3.35 1.55,3.43, body extent -3.56,-3.3 3.51,3.2, height 1.6
TC_A [mm] "Tantalum capacitor, type A,  1 pin - plus"
  rect 1.75x1.25 smd: 1(-1.325,0) 2(1.325,0)
  silkscreen extent -2.15,-0.97 1.7,1, body extent -1.73,-0.8 1.73,0.8, height 1.64
TSS-TD-19XA-XTR [mm]
  rect 1.1x1 smd: 1(-3.65,0) 2(3.65,0)
  silkscreen extent -3.1,-1.9 3.1,1.9, body extent -4.05,-1.85 4.05,1.85, height 2.55

## Part data
C1A C1B C1C C1D C2A C2B C2C C2D C8A C8B C8C C8D: library part Capacitor_1n_10_50V_X7R_0603C, "Конденсатор 0603C ёмкостью 1 н 10%, 50 В, X7R", Capacity (nF)=1, Dielectric=X7R, Tolerance=10%, Voltage (V)=50, Part Number=Capacitor_1n_10_50V_X7R_0603C
C3A C3B C3C C3D C5A C5B C5C C5D C6A C6B C6C C6D C22: library part Capacitor_0,1u_10_50V_X7R_0603C, "Конденсатор 0603C ёмкостью 0,1 мк 10%, 50 В, X7R", Capacity (nF)=100, Dielectric=X7R, Tolerance=10%, Voltage (V)=50, Part Number=Capacitor_0,1u_10_50V_X7R_0603C
C4A C4B C4C C4D C14 C19 C20: library part Capacitor_1u_10_50V_X7R_0603C, "Конденсатор 0603C ёмкостью 1 мк 10%, 50 В, X7R", Capacity (nF)=1000, Dielectric=X7R, Tolerance=10%, Voltage (V)=50, Part Number=Capacitor_1u_10_50V_X7R_0603C
C7A C7B C7C C7D: library part Capacitor_100u_10_50V_TC_A, "Танталовый конденсатор", Capacity (uF)=100, Tolerance=0,1, Voltage (V)=50, Part Number=Capacitor_100u_10_50V_TC_A, Type=Tantalum
C9: library part Capacitor_4,7u_10_50V_X7R_1206C, "Конденсатор", Capacity (nF)=4700, Dielectric=X7R, Tolerance=0,1, Voltage (V)=50, Library Path2=Schematic\Capacitor.SchLib, Part Number=Capacitor_4,7u_10_50V_X7R_1206C
C10 C11 C12 C13 C17 C21: library part Capacitor_0,1u_10_50V_X7R_0603C, "Конденсатор", Capacity (nF)=100, Dielectric=X7R, Tolerance=0,1, Voltage (V)=50, Library Path2=Schematic\Capacitor.SchLib, Part Number=Capacitor_0,1u_10_50V_X7R_0603C
C15 C16 C18: library part Capacitor_10u_10_35V_X7R_1210C, "Конденсатор", Capacity (nF)=10000, Dielectric=X7R, Tolerance=0,1, Voltage (V)=35, Library Path2=Schematic\Capacitor.SchLib, Part Number=Capacitor_10u_10_35V_X7R_1210C
C23 C24: library part "0,1 мк", "Конденсатор 12п", Part Number=Capacitor
D1: library part SPBW06F-12, "Isolated Module DC DC Converter 1 Output 12V - - - 500mA 9V - 36V Input", Package="SIP-8 Mean Well", Check_prices=https://www.snapeda.com/parts/SPBW06F-12/Mean+Well/view-part/?ref=eda, MF="MEAN WELL", MP=SPBW06F-12, SnapEDA_Link=https://www.snapeda.com/parts/SPBW06F-12/Mean+Well/view-part/?ref=snap
D2: "Линейный стабилизатор напряжения", Part Number=LD1117S33CTR
D3: "Isolated Module DC DC Converter 1 Output 12V - - - 500mA 9V - 36V Input", Package="SIP-8 Mean Well", Check_prices=https://www.snapeda.com/parts/SPBW06F-12/Mean+Well/view-part/?ref=eda, MF="MEAN WELL", MP=SPBW06F-12, SnapEDA_Link=https://www.snapeda.com/parts/SPBW06F-12/Mean+Well/view-part/?ref=snap
DD1: "Mainstream Arm Cortex-M4 core with DSP and FPU, 170MHz with 128Kbytes of Flash memory, Math Accelerator, High Analog level integration", Manufacturer_Part_Number=stm32g4_lqfp48_t1, Built_By=EMA_Jessica, Copyright="Copyright (C) 2016 Accelerated Designs. All rights reserved", RefDes=RefDes, Type=DEV, Vendor=STMicroelectronics
DD2: "RS-485 приёмопередатчик", Part Number=MAX485CSA
HL1 HL2 HL3: "Светодиод", Color=Красный, Part Number=LED
J1A J1B J1C J1D: "Straight SMA Connector", Package=None, Availability=Unavailable, MP=altium_native_batch, Price=None
L1: library part Inductance, "Катушка индуктивности", Part Number=Inductance
R1A R1B R1C R1D R2A R2B R2C R2D R3A R3B R3C R3D R4A R4B R4C R4D R5A R5B R5C R5D R6A R6B R6C R6D: library part Resistor_51k_1_0603, "Резистор номиналом 51 кОм 1%", Tolerance=1%, Part Number=Resistor_51k_1_0603
R7A R7B R7C R7D R8A R8B R8C R8D: library part Resistor_47k_1_0603, "Резистор номиналом 47 кОм 1%", Tolerance=1%, Part Number=Resistor_47k_1_0603
R9A R9B R9C R9D R10A R10B R10C R10D: library part Resistor_91k_1_0603, "Резистор номиналом 91 кОм 1%", Tolerance=1%, Part Number=Resistor_91k_1_0603
R11A R11B R11C R11D: library part Resistor_1.1k_1_0603, "Резистор номиналом 1,1 кОм 1%", Tolerance=1%, Part Number=Resistor_1.1k_1_0603
R12A R12B R12C R12D: library part Resistor_12k_1_0603, "Резистор номиналом 12 кОм 1%", Tolerance=1%, Part Number=Resistor_12k_1_0603
R13A R13B R13C R13D R14A R14B R14C R14D: library part Resistor_3.0k_1_0603, "Резистор номиналом 3,0 кОм 1%", Tolerance=1%, Part Number=Resistor_3.0k_1_0603
R15: library part Resistor_2.0k_1_0603, "Резистор номиналом 2,0 кОм 1%", Tolerance=1%, Part Number=Resistor_2.0k_1_0603
R16 R17: library part Resistor_1.0k_1_0603, "Резистор номиналом 1,0 кОм и точностью 1%", Tolerance=1%, Part Number=Resistor_1.0k_1_0603
R18: library part Resistor_120_1_0603, "Резистор номиналом 120 Ом 1%", Tolerance=1%, Part Number=Resistor_120_1_0603
S1: "Тактовая кнопка", Datasheet=https://cdn.promelec.ru/upload/items/2023/04/17/TSS-TD-19XA.pdf, Part Number=TSS-TD-19XA-XTR, Автор=glebmih
U1A U1B U1C U1D: "Микросхема счетверённый активный полосовый фильтр", Package="SSOP-20 Linear Technology", Check_prices=https://www.snapeda.com/parts/LTC1562CG%23TR/Analog+Devices/view-part/?ref=eda, MF="Analog Devices", MP=LTC1562CG#TR, Part Number=LTC1562CG, SnapEDA_Link=https://www.snapeda.com/parts/LTC1562CG%23TR/Analog+Devices/view-part/?ref=snap
U2A U2B U2C U2D: "Усилитель с регулируемым усилением", Package="SOIC-8 Analog Devices", Check_prices=https://www.snapeda.com/parts/AD603ARZ-REEL7/Analog+Devices/view-part/?ref=eda, MF="Analog Devices", MP=AD603ARZ-REEL7, Part Number=AD603ARZ-REEL-REEL7, SnapEDA_Link=https://www.snapeda.com/parts/AD603ARZ-REEL7/Analog+Devices/view-part/?ref=snap
XP1: "10-пиновый разъём с ключём", Value1=+16В, Value3=Общий, Value5=RS485_A, Value6=RS485_B, Value8=SWD, Value9=SWCLK, Value10=+3.3, Part Number=IDC-10, System=Connector, Value2=+16В, Value4=Общий, Value7=Общий
ZQ1: "Кварцевый резонатор с входом земли", Part Number=XTAL_GND

## Free pads (board coordinates)
  round 5 hole 3: 2(77,62) 3(77,3) 4(3,3) 5(3,62)

## Via types
v1: diameter 0.5, hole 0.2, Top Layer 1 to Bottom Layer 1, 41 vias

## Nets (pads, with @x,y where several pads share a name; then routed paths per layer and width w, separated by ;. In a path a pad name is that pad's centre, name@x,y a point inside that pad or via, vN(x,y) a via of type N, cw(c..) or ccw(c..) an arc to the next point about the centre after c; other vN are vias at no path point)
+3,3В: C9.2 C11.2 C12.2 C13.2 C18.2 D2.2 DD1.24 DD1.36 DD1.48 HL2.1 XP1.10 | length 23.4
  Top Layer 1 w0.254: v1(54.1,12.3) 53.3,12.3 C11.2 53.5,13.1 DD1.48 ; v1(54.4,20.4) C12.2 55.8,20.1 DD1.36 ; v1(62.3,21.1) 62.4,21 C13.2 63.4,18.7 DD1.24 ; HL2.1 69.455,14.295 v1(69.5,14.25)
  Bottom Layer 1 w1: C9.2 65.625,16.325 70.4,16.325 70.7,16.625 XP1.10@70.7,23
  other v1: 66.5,18.25 68.5,18.25 72,18.5 65.5,19 67.5,19 69.5,19 73.5,19
+5В: C3A.2 C3B.2 C3C.2 C3D.2 C10.2 C16.2 D1.6 D2.3 DD2.8 HL1.1 U1A.5 U1B.5 U1C.5 U1D.5 | length 173.5
  Top Layer 1 w0.254: C3A.2 20.018,52.636 U1A.5 ; C3D.2 20.268,12.886 U1D.5 ; C3C.2 20.268,26.136 U1C.5 ; C3B.2 20.268,39.386 U1B.5 ; HL1.1 58.273,39.373 58.4,39.5
  Top Layer 1 w0.5: v1(18.2,13.3) 18.523,12.977 C3D.2 ; v1(18.2,39.5) 18.223,39.477 C3B.2 ; v1(18.2,52.7) 18.227,52.727 C3A.2 ; v1(18.3,26.2) 18.327,26.227 C3C.2 ; v1(54.5,29) 54.625,29.125 DD2.8
  Top Layer 1 w1: v1(54.5,29) 54.5,32.5 58.273,36.273 58.273,39.373 ; 58.3,39.4 D1.6
  Bottom Layer 1 w0.5: D1.6@58.4,44.2 58.825,44.625 C16.2
  Bottom Layer 1 w1: v1@18.2,13.4 v1(18.2,39.5) v1(18.2,52.7) 18.2,57.8 19.5,59.1 62.3,59.1 62.8,58.6 62.8,53 58.825,49.025 C16.2 ; v1(54.5,29) 54.4,28.9 54.4,27.248 61.4,20.248 61.9,20.248 63.4,18.748 63.4,10.475 D2.3 68.1,7.9 C10.2
+12В: C15.2 D3.6 R12A.2 R12B.2 R12C.2 R12D.2 R14A.2 R14B.2 R14C.2 R14D.2 U2A.8 U2B.8 U2C.8 U2D.8 | length 134.2
  Top Layer 1 w0.5: v1(35.5,17.6) 35.877,17.977 R12D.2 ; v1(35.5,31.2) 35.527,31.227 R12C.2 ; v1(35.5,44.45) 35.527,44.477 R12B.2 ; v1(35.6,25.8) 35.673,25.727 R14C.2 ; v1(35.6,39.05) 35.673,38.977 R14B.2 ; v1(35.6,56.6) 35.6,56.75 R12A.2 ; v1(35.604,52.004) 35.827,52.227 R14A.2 ; v1(35.735,12.6) 35.76,12.575 35.859,12.477 R14D.2 ; U2D.8 44.518,17.882 44.2,18.2 44.2,31.3 ; U2C.8 44.368,31.132 44.2,31.3 ; U2B.8 44.218,44.382 44.2,44.4 ; v1(49.7,56.9) 48.968,57.632 U2A.8 44.532,57.632 44.2,57.3 44.2,44.4 ; 44.2,31.3 44.2,44.4
  Bottom Layer 1 w0.5: C15.2@58.3,51.459 D3.6
  Bottom Layer 1 w1: 35.5,12.2 v1(35.5,31.2) 35.5,52.004 35.5,56.6 35.7,56.8 57.3,56.8 58.3,55.8 D3.6
+16В: D1.2 D3.2 XP1.1 XP1.2 | length 23.5
  Top Layer 1 w1: XP1.1@68.06,33.16 XP1.2 XP1.2@70.7,33.16
  Bottom Layer 1 w1: XP1.1 67.96,43.56 D1.2 ; D1.2@68.6,44.3 D3.2
AGND: C3A.1 C3B.1 C3C.1 C3D.1 C4A.1 C4B.1 C4C.1 C4D.1 C6A.2 C6B.2 C6C.2 C6D.2 C7A.2 C7B.2 C7C.2 C7D.2 C8A.1 C8B.1 C8C.1 C8D.1 C9.1 C10.1 C11.1 C12.1 C13.1 C14.1 C15.1 C16.1 C17.1 C18.1 C19.1 C20.1 C21.1 C22.1 C23.1 C24.1 D1.1 D1.7 D2.1 D3.1 D3.7 DD1.19 DD1.23 DD1.35 DD1.47 DD2.5 J1A.G1 J1A.G2 J1A.G3 J1A.G4 J1B.G1 J1B.G2 J1B.G3 J1B.G4 J1C.G1 J1C.G2 J1C.G3 J1C.G4 J1D.G1 J1D.G2 J1D.G3 J1D.G4 R11A.1 R11B.1 R11C.1 R11D.1 R13A.1 R13B.1 R13C.1 R13D.1 R15.1 R16.1 R17.1 S1.1 U1A.4 U1A.6 U1A.7 U1A.14 U1A.16 U1A.17 U1B.4 U1B.6 U1B.7 U1B.14 U1B.16 U1B.17 U1C.4 U1C.6 U1C.7 U1C.14 U1C.16 U1C.17 U1D.4 U1D.6 U1D.7 U1D.14 U1D.16 U1D.17 U2A.6 U2B.6 U2C.6 U2D.6 XP1.3 XP1.4 XP1.7 ZQ1.3 | length 31.3
  Top Layer 1 w0.254: U1A.16 U1A.17 ; U1D.16 U1D.17 ; U1C.16 U1C.17 ; U1B.16 U1B.17 ; U2A.6 47.592,55.092 C8A.1 ; U2D.6 47.842,15.342 C8D.1 ; U2C.6 47.842,28.592 C8C.1 ; U2B.6 47.842,41.842 C8B.1 ; C11.1 53.6,13.6 DD1.47 ; C12.1@55.7,21.2 C12.1 ; C24.1@55.8,7.8 57.45,7.8 ZQ1.3@57.5,7.85 ; C12.1@56.3,21.1 56.3,21.5 56.8,21 DD1.35 ; ZQ1.3@59.8,6 61.6,6 C23.1@61.8,6.2 ; C22.1 68.7,11.5 v1(69.2,11.5)
  Bottom Layer 1 w0.254: v1(64.7,11.35) 64.7,12.1 64.8,12.2 C9.1@64.8,12.5 ; v1(66,6.5) 66.6,7.1 C10.1 ; D2.1 73.175,10 v1(73.75,10)
  Bottom Layer 1 w0.5: C15.1 55.075,53.175 D3.7 ; C16.1 55.8,46.775 D1.7
CH1: DD1.17 U2A.7 | length 52.2
  Top Layer 1 w0.254: U2A.7 48.538,56.362 v1(49.5,55.4) v1@49.462,55.362 ; DD1.17 64.1,15.1 64.75,15.75 v1(64.75,17.5)
  Bottom Layer 1 w0.254: v1(49.5,55.4) 52,52.9 52,42.6 64.75,29.85 v1(64.75,17.5)
CH2: DD1.26 U2B.7 | length 31
  Top Layer 1 w0.254: U2B.7 48.388,43.112 v1(49.8,41.7) ; DD1.26 v1(61.3,22.1)
  Bottom Layer 1 w0.254: v1(49.8,41.7) 61.3,30.2 v1(61.3,22.1)
CH3: DD1.8 U2C.7 | length 31.1
  Top Layer 1 w0.254: U2C.7 48.538,29.862 v1(49.6,28.8) ; v1(59.75,10.5) 59.8,10.55 DD1.8
  Bottom Layer 1 w0.254: v1(49.6,28.8) 52,26.4 52,13.4 55.3,10.1 59.25,10.1 59.65,10.5 v1(59.75,10.5)
CH4: DD1.9 U2D.7 | length 20.5
  Top Layer 1 w0.254: U2D.7 49.388,16.612 v1(50.4,15.6) ; v1(60.3,9.8) 60.3,10.269 60.302,10.271 60.302,10.729 60.3,10.731 DD1.9
  Bottom Layer 1 w0.254: v1(50.4,15.6) 50.4,14 55.067,9.333 59.833,9.333 v1(60.3,9.8)
Gain: DD1.12 U2A.1 U2B.1 U2C.1 U2D.1 | length 82.3
  Top Layer 1 w0.254: U2D.1 41.252,17.882 41.97,18.6 43.35,18.6 ; U2C.1 41.252,31.132 41.97,31.85 43.35,31.85 ; U2B.1 41.252,44.382 41.97,45.1 43.35,45.1 ; 41.002,57.632 U2A.1 41.968,57.632 43.35,56.25 43.35,45.1 ; v1(52.2,7.7) 47.75,7.7 43.35,12.1 43.35,18.6 ; v1(61.75,10) 61.8,10.05 DD1.12 ; 43.35,18.6 43.35,31.85 ; 43.35,31.85 43.35,45.1
  Bottom Layer 1 w0.254: v1(52.2,7.7) 59.8,7.7 61.75,9.65 v1(61.75,10)
LED_ERROR: DD1.2 HL3.1 | length 17.5
  Top Layer 1 w0.254: DD1.2 56.8,12.3 57.5,13 62,13 62.5,12.5 70.5,12.5 71.226,13.226 HL3.1
NetC1A_1: C1A.1 J1A.1 | length 9.5
  Top Layer 1 w0.254: J1A.1 12.127,55.627 13.85,57.35 C1A.1@17.092,57.35
NetC1A_2: C1A.2 R1A.1 R3A.1 U1A.1 | length 7.6
  Top Layer 1 w0.254: R1A.1 R3A.1 18.722,55.826 18.722,57.297 20.157,57.297 U1A.1
NetC1B_1: C1B.1 J1B.1 | length 9.5
  Top Layer 1 w0.254: J1B.1 12.377,42.377 14.1,44.1 C1B.1@17.342,44.1
NetC1B_2: C1B.2 R1B.1 R3B.1 U1B.1 | length 7.6
  Top Layer 1 w0.254: R1B.1 R3B.1 18.972,42.576 18.972,44.047 20.407,44.047 U1B.1
NetC1C_1: C1C.1 J1C.1 | length 9.5
  Top Layer 1 w0.254: J1C.1 12.377,29.127 14.1,30.85 C1C.1@17.342,30.85
NetC1C_2: C1C.2 R1C.1 R3C.1 U1C.1 | length 7.6
  Top Layer 1 w0.254: R1C.1 R3C.1 18.972,29.326 18.972,30.797 20.407,30.797 U1C.1
NetC1D_1: C1D.1 J1D.1 | length 9.5
  Top Layer 1 w0.254: J1D.1 12.377,15.877 14.1,17.6 C1D.1@17.342,17.6
NetC1D_2: C1D.2 R1D.1 R3D.1 U1D.1 | length 7.6
  Top Layer 1 w0.254: R1D.1 R3D.1 18.972,16.076 18.972,17.547 20.407,17.547 U1D.1
NetC2A_1: C2A.1 R7A.1 U1A.18 | length 14.6
  Top Layer 1 w0.254: C2A.1 25.977,50.455 25.977,51.966 27.942,53.931 U1A.18 30.681,53.931 31.563,54.813 32.217,54.813 R7A.1
NetC2A_2: C2A.2 R2A.1 R4A.1 U1A.10 | length 5.1
  Top Layer 1 w0.254: R4A.1 R2A.1 21.59,47.668 C2A.2 22.227,48.305 U1A.10
NetC2B_1: C2B.1 R7B.1 U1B.18 | length 14.6
  Top Layer 1 w0.254: C2B.1 26.227,37.205 26.227,38.716 28.192,40.681 U1B.18 30.931,40.681 31.813,41.563 32.467,41.563 R7B.1
NetC2B_2: C2B.2 R2B.1 R4B.1 U1B.10 | length 5.1
  Top Layer 1 w0.254: R4B.1 R2B.1 21.84,34.418 C2B.2 22.477,35.055 U1B.10
NetC2C_1: C2C.1 R7C.1 U1C.18 | length 14.6
  Top Layer 1 w0.254: C2C.1 26.227,23.955 26.227,25.466 28.192,27.431 U1C.18 30.931,27.431 31.813,28.313 32.467,28.313 R7C.1
NetC2C_2: C2C.2 R2C.1 R4C.1 U1C.10 | length 5.1
  Top Layer 1 w0.254: R4C.1 R2C.1 21.84,21.168 C2C.2 22.477,21.805 U1C.10
NetC2D_1: C2D.1 R7D.1 U1D.18 | length 14.6
  Top Layer 1 w0.254: C2D.1 26.227,10.705 26.227,12.216 28.192,14.181 U1D.18 30.931,14.181 31.813,15.063 32.467,15.063 R7D.1
NetC2D_2: C2D.2 R2D.1 R4D.1 U1D.10 | length 5.1
  Top Layer 1 w0.254: R4D.1 R2D.1 21.84,7.918 C2D.2 22.477,8.555 U1D.10
NetC4A_2: C4A.2 U1A.15 | length 2.6
  Top Layer 1 w0.254: U1A.15 31.478,51.976 C4A.2
NetC4B_2: C4B.2 U1B.15 | length 2.6
  Top Layer 1 w0.254: U1B.15 31.728,38.726 C4B.2
NetC4C_2: C4C.2 U1C.15 | length 2.6
  Top Layer 1 w0.254: U1C.15 31.728,25.476 C4C.2
NetC4D_2: C4D.2 U1D.15 | length 2.6
  Top Layer 1 w0.254: U1D.15 31.728,12.226 C4D.2
NetC5A_1: C5A.1 R8A.1 U1A.13 | length 11.2
  Top Layer 1 w0.254: U1A.13 32.249,50.68 R8A.1 33.2,52.2 35.227,54.227 C5A.1
NetC5A_2: C5A.2 U2A.3 | length 2.3
  Top Layer 1 w0.254: C5A.2 39.192,55.092 U2A.3@40.263,55.092
NetC5B_1: C5B.1 R8B.1 U1B.13 | length 11.4
  Top Layer 1 w0.254: U1B.13 32.499,37.43 R8B.1 33.45,39.25 35.177,40.977 C5B.1
NetC5B_2: C5B.2 U2B.3 | length 2.3
  Top Layer 1 w0.254: C5B.2 39.442,41.842 U2B.3@40.513,41.842
NetC5C_1: C5C.1 R8C.1 U1C.13 | length 11.2
  Top Layer 1 w0.254: U1C.13 32.499,24.18 R8C.1 33.45,25.55 35.627,27.727 C5C.1
NetC5C_2: C5C.2 U2C.3 | length 2.3
  Top Layer 1 w0.254: C5C.2 39.442,28.592 U2C.3@40.513,28.592
NetC5D_1: C5D.1 R8D.1 U1D.13 | length 11.4
  Top Layer 1 w0.254: U1D.13 32.499,10.93 R8D.1 33.45,12.75 35.177,14.477 C5D.1
NetC5D_2: C5D.2 U2D.3 | length 2.3
  Top Layer 1 w0.254: C5D.2 39.442,15.342 U2D.3@40.513,15.342
NetC6A_1: C6A.1 C7A.1 R13A.2 R14A.1 U2A.4 | length 7.5
  Top Layer 1 w0.254: R14A.1 R13A.2 ; C7A.1 39.427,48.752 C6A.1 39.727,50.527 R13A.2 ; U2A.4@40.263,53.822 39.727,53.286 R13A.2
NetC6B_1: C6B.1 C7B.1 R13B.2 R14B.1 U2B.4 | length 7.5
  Top Layer 1 w0.254: R14B.1 R13B.2 ; C7B.1 39.677,35.502 C6B.1 39.977,37.277 R13B.2 ; U2B.4@40.513,40.572 39.977,40.036 R13B.2
NetC6C_1: C6C.1 C7C.1 R13C.2 R14C.1 U2C.4 | length 7.5
  Top Layer 1 w0.254: R14C.1 R13C.2 ; C7C.1 39.677,22.252 C6C.1 39.977,24.027 R13C.2 ; U2C.4@40.513,27.322 39.977,26.786 R13C.2
NetC6D_1: C6D.1 C7D.1 R13D.2 R14D.1 U2D.4 | length 7.5
  Top Layer 1 w0.254: R14D.1 R13D.2 ; C7D.1 39.677,9.002 C6D.1 39.977,10.777 R13D.2 ; U2D.4@40.513,14.072 39.977,13.536 R13D.2
NetC8A_2: C8A.2 U2A.5 | length 2.6
  Top Layer 1 w0.254: U2A.5@45.191,53.822 47.532,53.822 C8A.2
NetC8B_2: C8B.2 U2B.5 | length 2.6
  Top Layer 1 w0.254: U2B.5@45.441,40.572 47.782,40.572 C8B.2
NetC8C_2: C8C.2 U2C.5 | length 2.6
  Top Layer 1 w0.254: U2C.5@45.441,27.322 47.782,27.322 C8C.2
NetC8D_2: C8D.2 U2D.5 | length 2.6
  Top Layer 1 w0.254: U2D.5@45.441,14.072 47.782,14.072 C8D.2
NetC14_2: C14.2 C17.2 L1.1 | length 3.5
  Bottom Layer 1 w0.254: C17.2 C17.2@60.105,18.295
  Bottom Layer 1 w0.3: C14.2 C17.2 ; C17.2@60.105,18.295 L1.1
NetC19_2: C19.2 DD1.1 | length 1.7
  Top Layer 1 w0.254: C19.2 56.3,10.9 DD1.1
NetC20_2: C20.2 C21.2 DD1.20 | length 4.7
  Top Layer 1 w0.254: v1(62.1,16.2) 62.5,16.6 DD1.20
  Bottom Layer 1 w0.254: C20.2 61.714,15.814 v1(62.1,16.2)
  Bottom Layer 1 w0.3: C21.2 C20.2
NetC22_2: C22.2 DD1.7 S1.2 | length 12.6
  Top Layer 1 w0.254: DD1.7 59.3,10.831 59.198,10.729 59.198,10.002 60,9.2 64.8,9.2 C22.2 66.2,7.65 S1.2
NetC23_2: C23.2 DD1.6 ZQ1.1 | length 6.1
  Top Layer 1 w0.254: DD1.6 58.8,10.136 58.8,8.75 ZQ1.1 ; ZQ1.1@59.8,7.85 59.85,7.8 C23.2@61.8,7.8
NetC24_2: C24.2 DD1.5 ZQ1.2 | length 7.7
  Top Layer 1 w0.254: C24.2@55.8,6.2 57.3,6.2 57.5,6 58.3,6.8 58.3,7.219 58.302,7.221 58.302,8.479 58.3,8.481 58.3,10.1 DD1.5
NetDD1_21: DD1.21 L1.2 | length 1.9
  Top Layer 1 w0.254: v1(62.4,17.1) DD1.21
  Bottom Layer 1 w0.254: L1.2 61.695,17.1 v1(62.4,17.1)
NetHL1_2: HL1.2 R15.2 | length 2.4
  Top Layer 1 w0.254: R15.2 53.95,37.373 HL1.2
NetHL2_2: HL2.2 R16.2 | length 2.3
  Top Layer 1 w0.254: R16.2 65.75,14.837 HL2.2
NetHL3_2: HL3.2 R17.2 | length 2.3
  Top Layer 1 w0.254: HL3.2 73.576,14.418 R17.2
NetR1A_2: R1A.2 R5A.1 U1A.3 | length 9.8
  Top Layer 1 w0.254: R1A.2 20.108,53.931 U1A.3 24.955,53.931 R5A.1
NetR1B_2: R1B.2 R5B.1 U1B.3 | length 9.8
  Top Layer 1 w0.254: R1B.2 20.358,40.681 U1B.3 25.205,40.681 R5B.1
NetR1C_2: R1C.2 R5C.1 U1C.3 | length 9.8
  Top Layer 1 w0.254: R1C.2 20.358,27.431 U1C.3 25.205,27.431 R5C.1
NetR1D_2: R1D.2 R5D.1 U1D.3 | length 9.8
  Top Layer 1 w0.254: R1D.2 20.358,14.181 U1D.3 25.205,14.181 R5D.1
NetR2A_2: R2A.2 U1A.9 | length 2.5
  Top Layer 1 w0.254: R2A.2 21.17,50.02 U1A.9
NetR2B_2: R2B.2 U1B.9 | length 2.5
  Top Layer 1 w0.254: R2B.2 21.42,36.77 U1B.9
NetR2C_2: R2C.2 U1C.9 | length 2.5
  Top Layer 1 w0.254: R2C.2 21.42,23.52 U1C.9
NetR2D_2: R2D.2 U1D.9 | length 2.5
  Top Layer 1 w0.254: R2D.2 21.42,10.27 U1D.9
NetR3A_2: R3A.2 U1A.2 | length 2.9
  Top Layer 1 w0.254: R3A.2 20.007,55.562 20.977,54.592 U1A.2
NetR3B_2: R3B.2 U1B.2 | length 2.9
  Top Layer 1 w0.254: R3B.2 20.257,42.312 21.227,41.342 U1B.2
NetR3C_2: R3C.2 U1C.2 | length 2.9
  Top Layer 1 w0.254: R3C.2 20.257,29.062 21.227,28.092 U1C.2
NetR3D_2: R3D.2 U1D.2 | length 2.9
  Top Layer 1 w0.254: R3D.2 20.257,15.812 21.227,14.842 U1D.2
NetR4A_2: R4A.2 R6A.1 U1A.8 | length 18.2
  Top Layer 1 w0.254: U1A.8@22.28,50.627 U1A.8 21.18,50.68 20.727,50.227 19.726,50.227 R4A.2 18.218,48.968 17.227,47.977 17.227,47.227 17.727,46.727 24.227,46.727 25.056,47.556 R6A.1
NetR4B_2: R4B.2 R6B.1 U1B.8 | length 18.2
  Top Layer 1 w0.254: U1B.8@22.53,37.377 U1B.8 21.43,37.43 20.977,36.977 19.976,36.977 R4B.2 18.468,35.718 17.477,34.727 17.477,33.977 17.977,33.477 24.477,33.477 25.306,34.306 R6B.1
NetR4C_2: R4C.2 R6C.1 U1C.8 | length 18.2
  Top Layer 1 w0.254: U1C.8@22.53,24.127 U1C.8 21.43,24.18 20.977,23.727 19.976,23.727 R4C.2 18.468,22.468 17.477,21.477 17.477,20.727 17.977,20.227 24.477,20.227 25.306,21.056 R6C.1
NetR4D_2: R4D.2 R6D.1 U1D.8 | length 18.2
  Top Layer 1 w0.254: U1D.8@22.53,10.877 U1D.8 21.43,10.93 20.977,10.477 19.976,10.477 R4D.2 18.468,9.218 17.477,8.227 17.477,7.477 17.977,6.977 24.477,6.977 25.306,7.806 R6D.1
NetR5A_2: R5A.2 R7A.2 R9A.2 U1A.20 | length 6.1
  Top Layer 1 w0.254: U1A.20 29.186,56.863 R5A.2 31.422,57.335 33.439,57.335 R7A.2
NetR5B_2: R5B.2 R7B.2 R9B.2 U1B.20 | length 6.1
  Top Layer 1 w0.254: U1B.20 29.436,43.613 R5B.2 31.672,44.085 33.689,44.085 R7B.2
NetR5C_2: R5C.2 R7C.2 R9C.2 U1C.20 | length 6.1
  Top Layer 1 w0.254: U1C.20 29.436,30.363 R5C.2 31.672,30.835 33.689,30.835 R7C.2
NetR5D_2: R5D.2 R7D.2 R9D.2 U1D.20 | length 6.1
  Top Layer 1 w0.254: U1D.20 29.436,17.113 R5D.2 31.672,17.585 33.689,17.585 R7D.2
NetR6A_2: R6A.2 R8A.2 R10A.2 U1A.11 | length 6.3
  Top Layer 1 w0.254: R6A.2 29.278,49.294 U1A.11 29.763,49.385 30.591,48.557 R10A.2 33.073,48.557 R8A.2
NetR6B_2: R6B.2 R8B.2 R10B.2 U1B.11 | length 6.3
  Top Layer 1 w0.254: R6B.2 29.528,36.044 U1B.11 30.013,36.135 30.841,35.307 R10B.2 33.323,35.307 R8B.2
NetR6C_2: R6C.2 R8C.2 R10C.2 U1C.11 | length 6.3
  Top Layer 1 w0.254: R6C.2 29.528,22.794 U1C.11 30.013,22.885 30.841,22.057 R10C.2 33.323,22.057 R8C.2
NetR6D_2: R6D.2 R8D.2 R10D.2 U1D.11 | length 6.3
  Top Layer 1 w0.254: R6D.2 29.528,9.544 U1D.11 30.013,9.635 30.841,8.807 R10D.2 33.323,8.807 R8D.2
NetR9A_1: R9A.1 U1A.19 | length 3.2
  Top Layer 1 w0.254: U1A.19 30.56,54.592 31.11,55.142 31.11,55.777 31.383,56.05 R9A.1
NetR9B_1: R9B.1 U1B.19 | length 3.2
  Top Layer 1 w0.254: U1B.19 30.81,41.342 31.36,41.892 31.36,42.527 31.633,42.8 R9B.1
NetR9C_1: R9C.1 U1C.19 | length 3.2
  Top Layer 1 w0.254: U1C.19 30.81,28.092 31.36,28.642 31.36,29.277 31.633,29.55 R9C.1
NetR9D_1: R9D.1 U1D.19 | length 3.2
  Top Layer 1 w0.254: U1D.19 30.81,14.842 31.36,15.392 31.36,16.027 31.633,16.3 R9D.1
NetR10A_1: R10A.1 U1A.12 | length 2
  Top Layer 1 w0.254: U1A.12 31.005,50.02 R10A.1
NetR10B_1: R10B.1 U1B.12 | length 2
  Top Layer 1 w0.254: U1B.12 31.255,36.77 R10B.1
NetR10C_1: R10C.1 U1C.12 | length 2
  Top Layer 1 w0.254: U1C.12 31.255,23.52 R10C.1
NetR10D_1: R10D.1 U1D.12 | length 2
  Top Layer 1 w0.254: U1D.12 31.255,10.27 R10D.1
NetR11A_2: R11A.2 R12A.1 U2A.2 | length 4.6
  Top Layer 1 w0.254: R12A.1 R11A.2 38.512,56.362 U2A.2@40.263,56.362
NetR11B_2: R11B.2 R12B.1 U2B.2 | length 4.6
  Top Layer 1 w0.254: R12B.1 R11B.2 38.762,43.112 U2B.2@40.513,43.112
NetR11C_2: R11C.2 R12C.1 U2C.2 | length 4.6
  Top Layer 1 w0.254: R12C.1 R11C.2 38.762,29.862 U2C.2@40.513,29.862
NetR11D_2: R11D.2 R12D.1 U2D.2 | length 4.6
  Top Layer 1 w0.254: R12D.1 R11D.2 38.762,16.612 U2D.2@40.513,16.612
RS485_N: DD2.7 R18.2 XP1.6 | length 20.6
  Top Layer 1 w0.254: DD2.7 57.015,29.415 57.4,29.8 57.4,30.7 R18.2 57.396,31.496 57.396,32.61 58.294,33.508 61.01,33.508 65.984,28.534 66.708,28.534 66.708,28.599 67.441,29.332 68.479,29.332 69.212,28.599 69.212,28.534 70.046,28.534 XP1.6 XP1.6@70.7,28.08
RS485_P: DD2.6 R18.1 XP1.5 | length 16.3
  Top Layer 1 w0.254: DD2.6 58.285,29.515 57.9,29.9 57.9,30.7 R18.1 57.904,31.496 57.904,32.4 58.504,33 60.8,33 65.72,28.08 XP1.5 XP1.5@68.16,28.08
SWCKL: DD1.38 XP1.9 | length 25.6
  Top Layer 1 w0.254: DD1.38 55.8,18.1 56,18.3 56,18.9 55.8,19.1 54.479,19.1 53.679,19.9 53.679,25.079 54.2,25.6 62.1,25.6 64.7,23 XP1.9 XP1.9@68.16,23
SWD: DD1.37 XP1.8 | length 27
  Top Layer 1 w0.254: DD1.37 53.7,18.6 53.3,19 53.3,25.4 54,26.1 63.4,26.1 65.1,24.4 67.329,24.4 67.441,24.288 68.479,24.288 68.591,24.4 69.36,24.4 XP1.8 ; XP1.8@70.6,25.44 XP1.8@70.7,25.54
TX_EN: DD1.33 DD2.2 DD2.3 | length 12.2
  Top Layer 1 w0.254: 54.9,22.3 54.3,22.9 54.3,24.9 54.55,25.15 56.05,25.15 57.015,24.185 DD2.2 DD2.3 ; 54.905,22.3 56.6,22.3 57.8,21.1 DD1.33
UART_RX: DD1.32 DD2.1 | length 5.3
  Top Layer 1 w0.254: DD2.1 55.745,23.25 56.297,22.698 57.452,22.698 58.3,21.85 DD1.32
UART_TX: DD1.31 DD2.4 | length 3.9
  Top Layer 1 w0.254: DD1.31 58.8,21.8 59.555,22.555 DD2.4
pads on no net: D1.3 D1.5 D1.8 D3.3 D3.5 D3.8 DD1.3 DD1.4 DD1.10 DD1.11 DD1.13 DD1.14 DD1.15 DD1.16 DD1.18 DD1.22 DD1.25 DD1.27 DD1.28 DD1.29 DD1.30 DD1.34 DD1.39 DD1.40 DD1.41 DD1.42 DD1.43 DD1.44 DD1.45 DD1.46

## Polygon pours and split planes (outlines as drawn)
+3,3В on Bottom Layer 1 "+3,3В_L04_P006" (solid, pour order 6): 74,5.5 64.5,5.5 64.5,19.5 74,19.5
AGND on Bottom Layer 1 "AGND_L04_P011" (solid, pour order 11): 4,4 76,4 76,61 4,61
+3,3В on Top Layer "+3,3В_L02_P007" (solid, pour order 7): 52.5,22.5 52.5,9 74,9 74,19.5 65,19.5 65,22.5
AGND on Top Layer "AGND_L02_P009" (solid, pour order 9): 4,4 76,4 76,61 4,61
AGND on Top Layer 1 "AGND_L01_P010" (solid, pour order 10): 4,4 76,4 76,61 4,61
AGND on Bottom Layer "AGND_L03_P008" (solid, pour order 8): 4,4 76,4 76,61 4,61

## Silkscreen, mask and mechanical layers (free items; w line width, h text height)
Mechanical 15:
  the board outline again, w0.254

## Dimensions
77,65 to 77,0 on Mechanical 7
77,62 to 77,3 on Mechanical 7
3,3 to 77,3 on Mechanical 7
0,3 to 80,3 on Mechanical 7